# Altium PCB Peripheral_Processor_PCB_V2.PcbDoc (part 1 of 3)
Units mil, origin at the board's own origin, x right, y up, seen from the top; angles counter-clockwise.
Board outline 5600 x 4000 mil, 4 copper layers (Top Layer, Plane(Gnd), Plane(Power), Bottom Layer), stack 23.756 mil thick; 207 components, 234 nets, 739 pads, 214 vias.
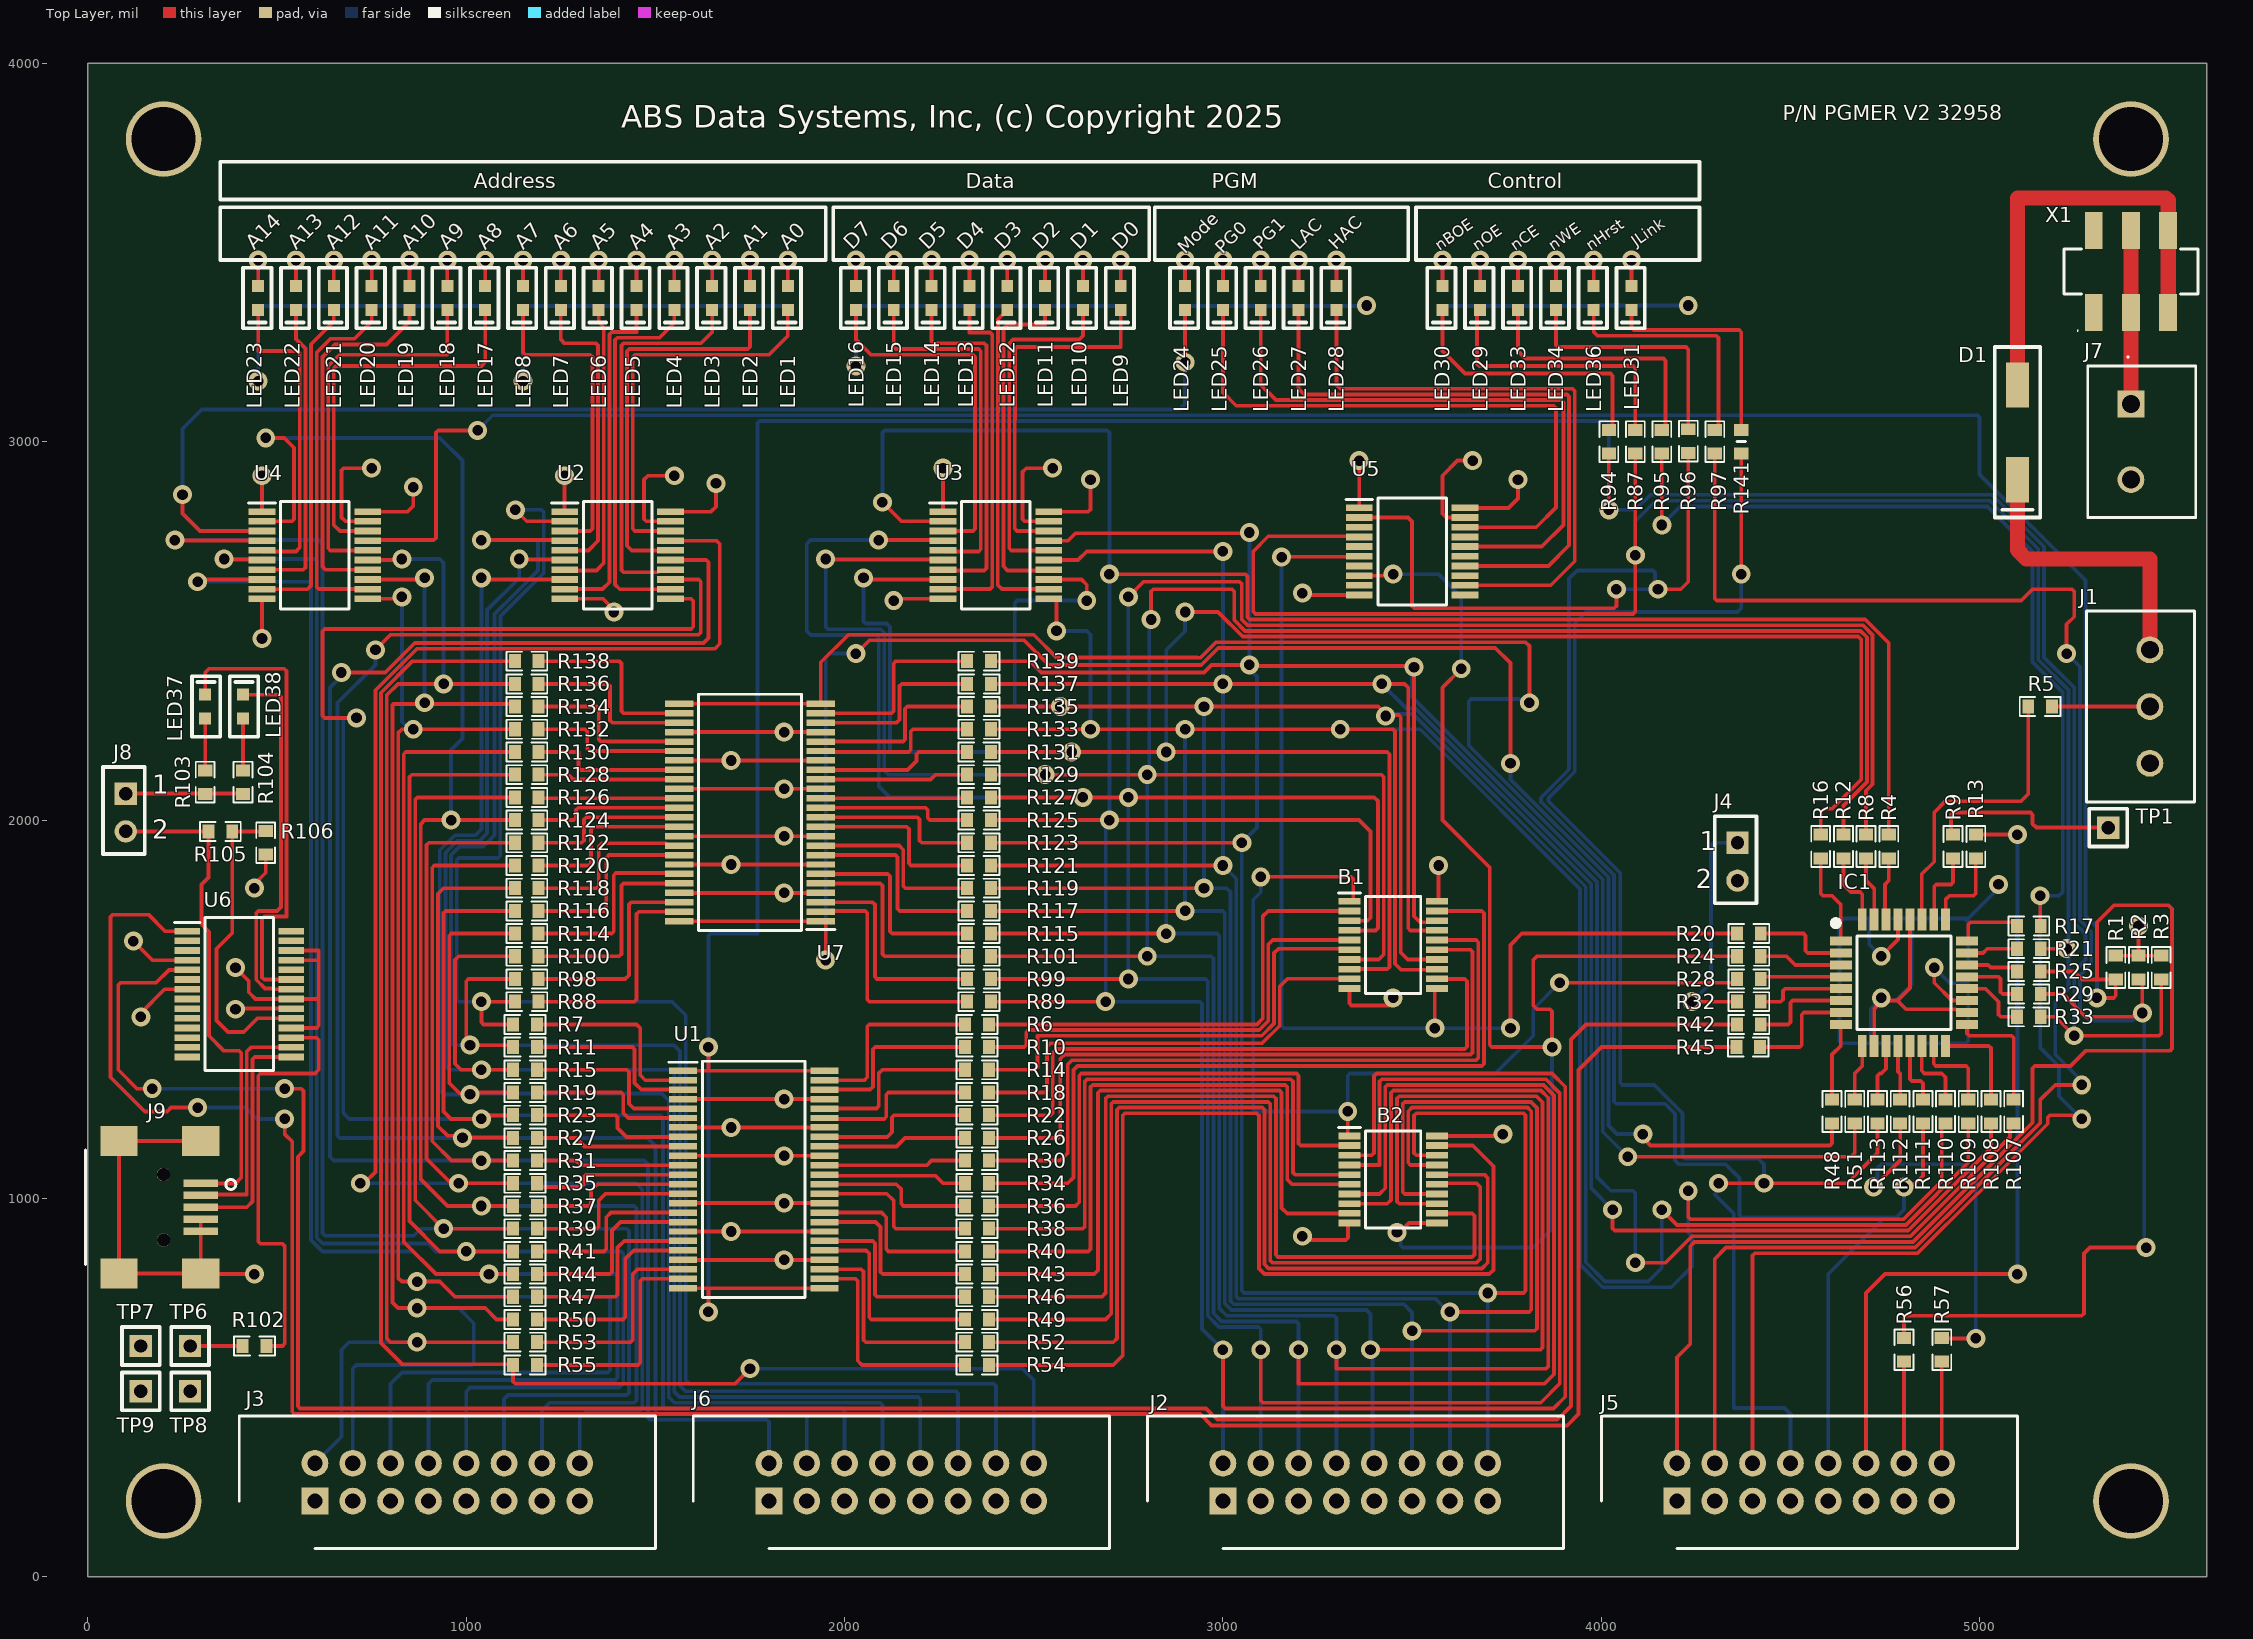
[diagram p0: Top Layer view]
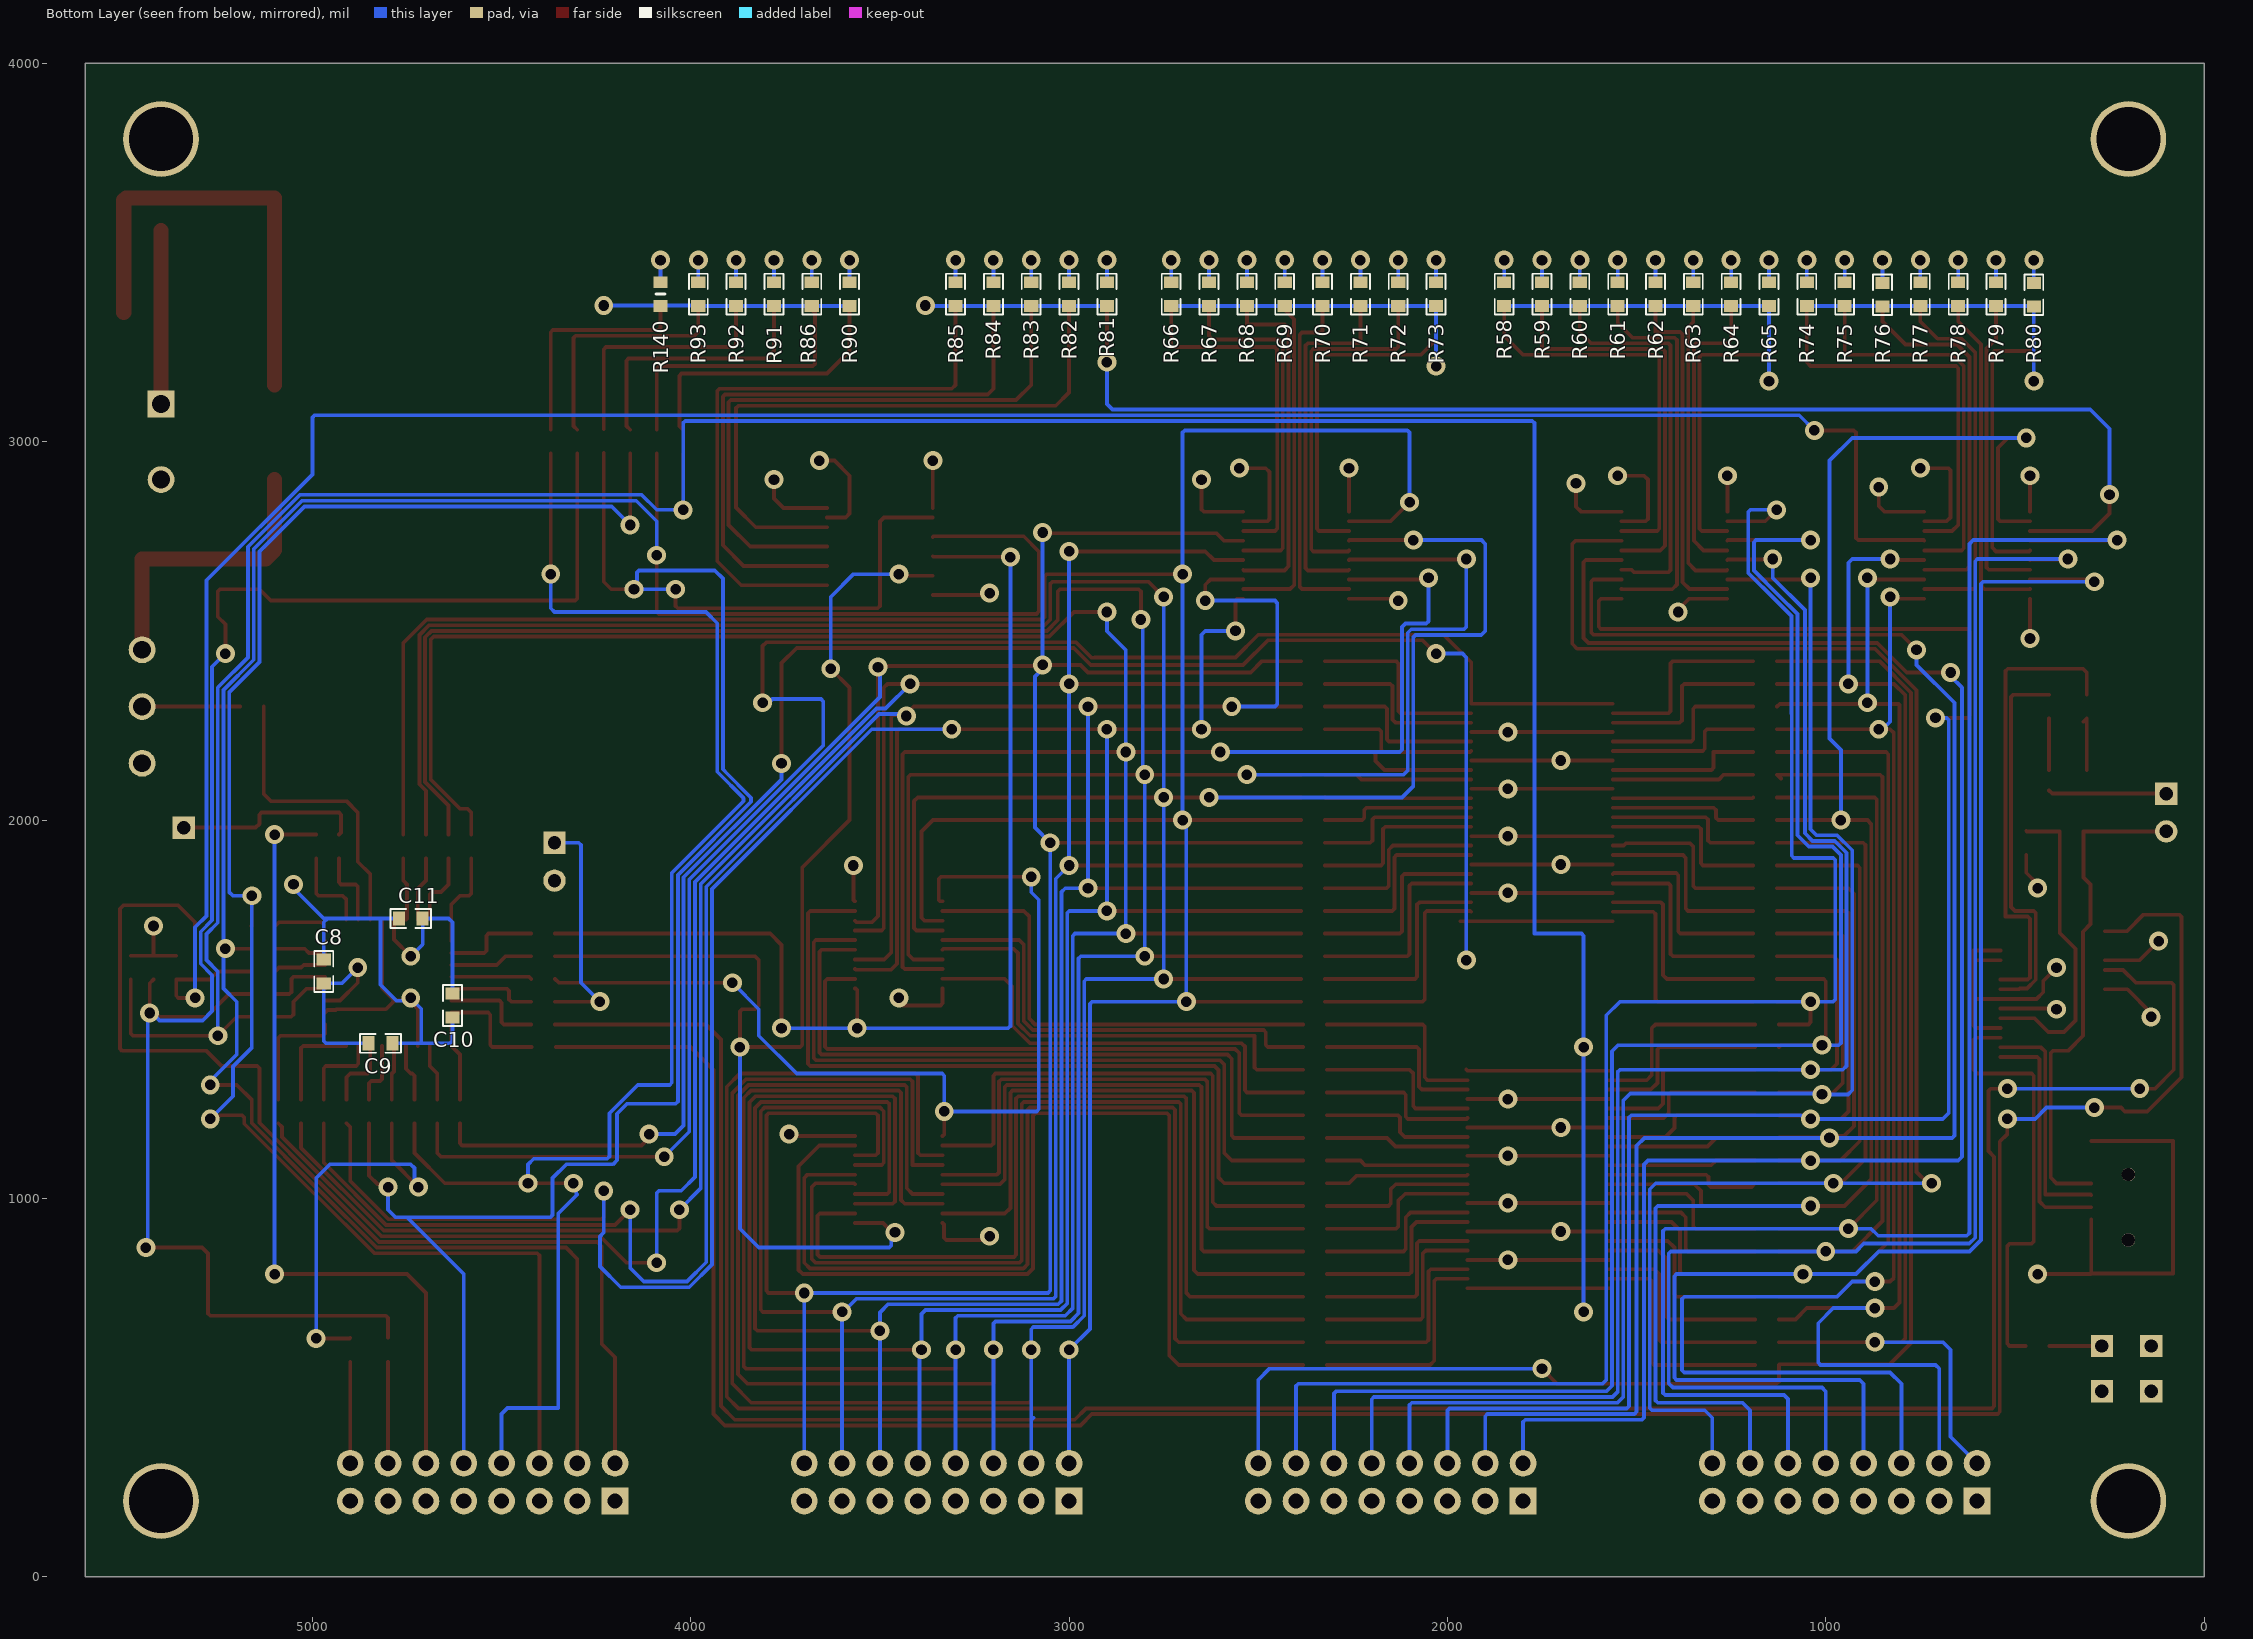
[diagram p1: Bottom Layer view, seen from below]
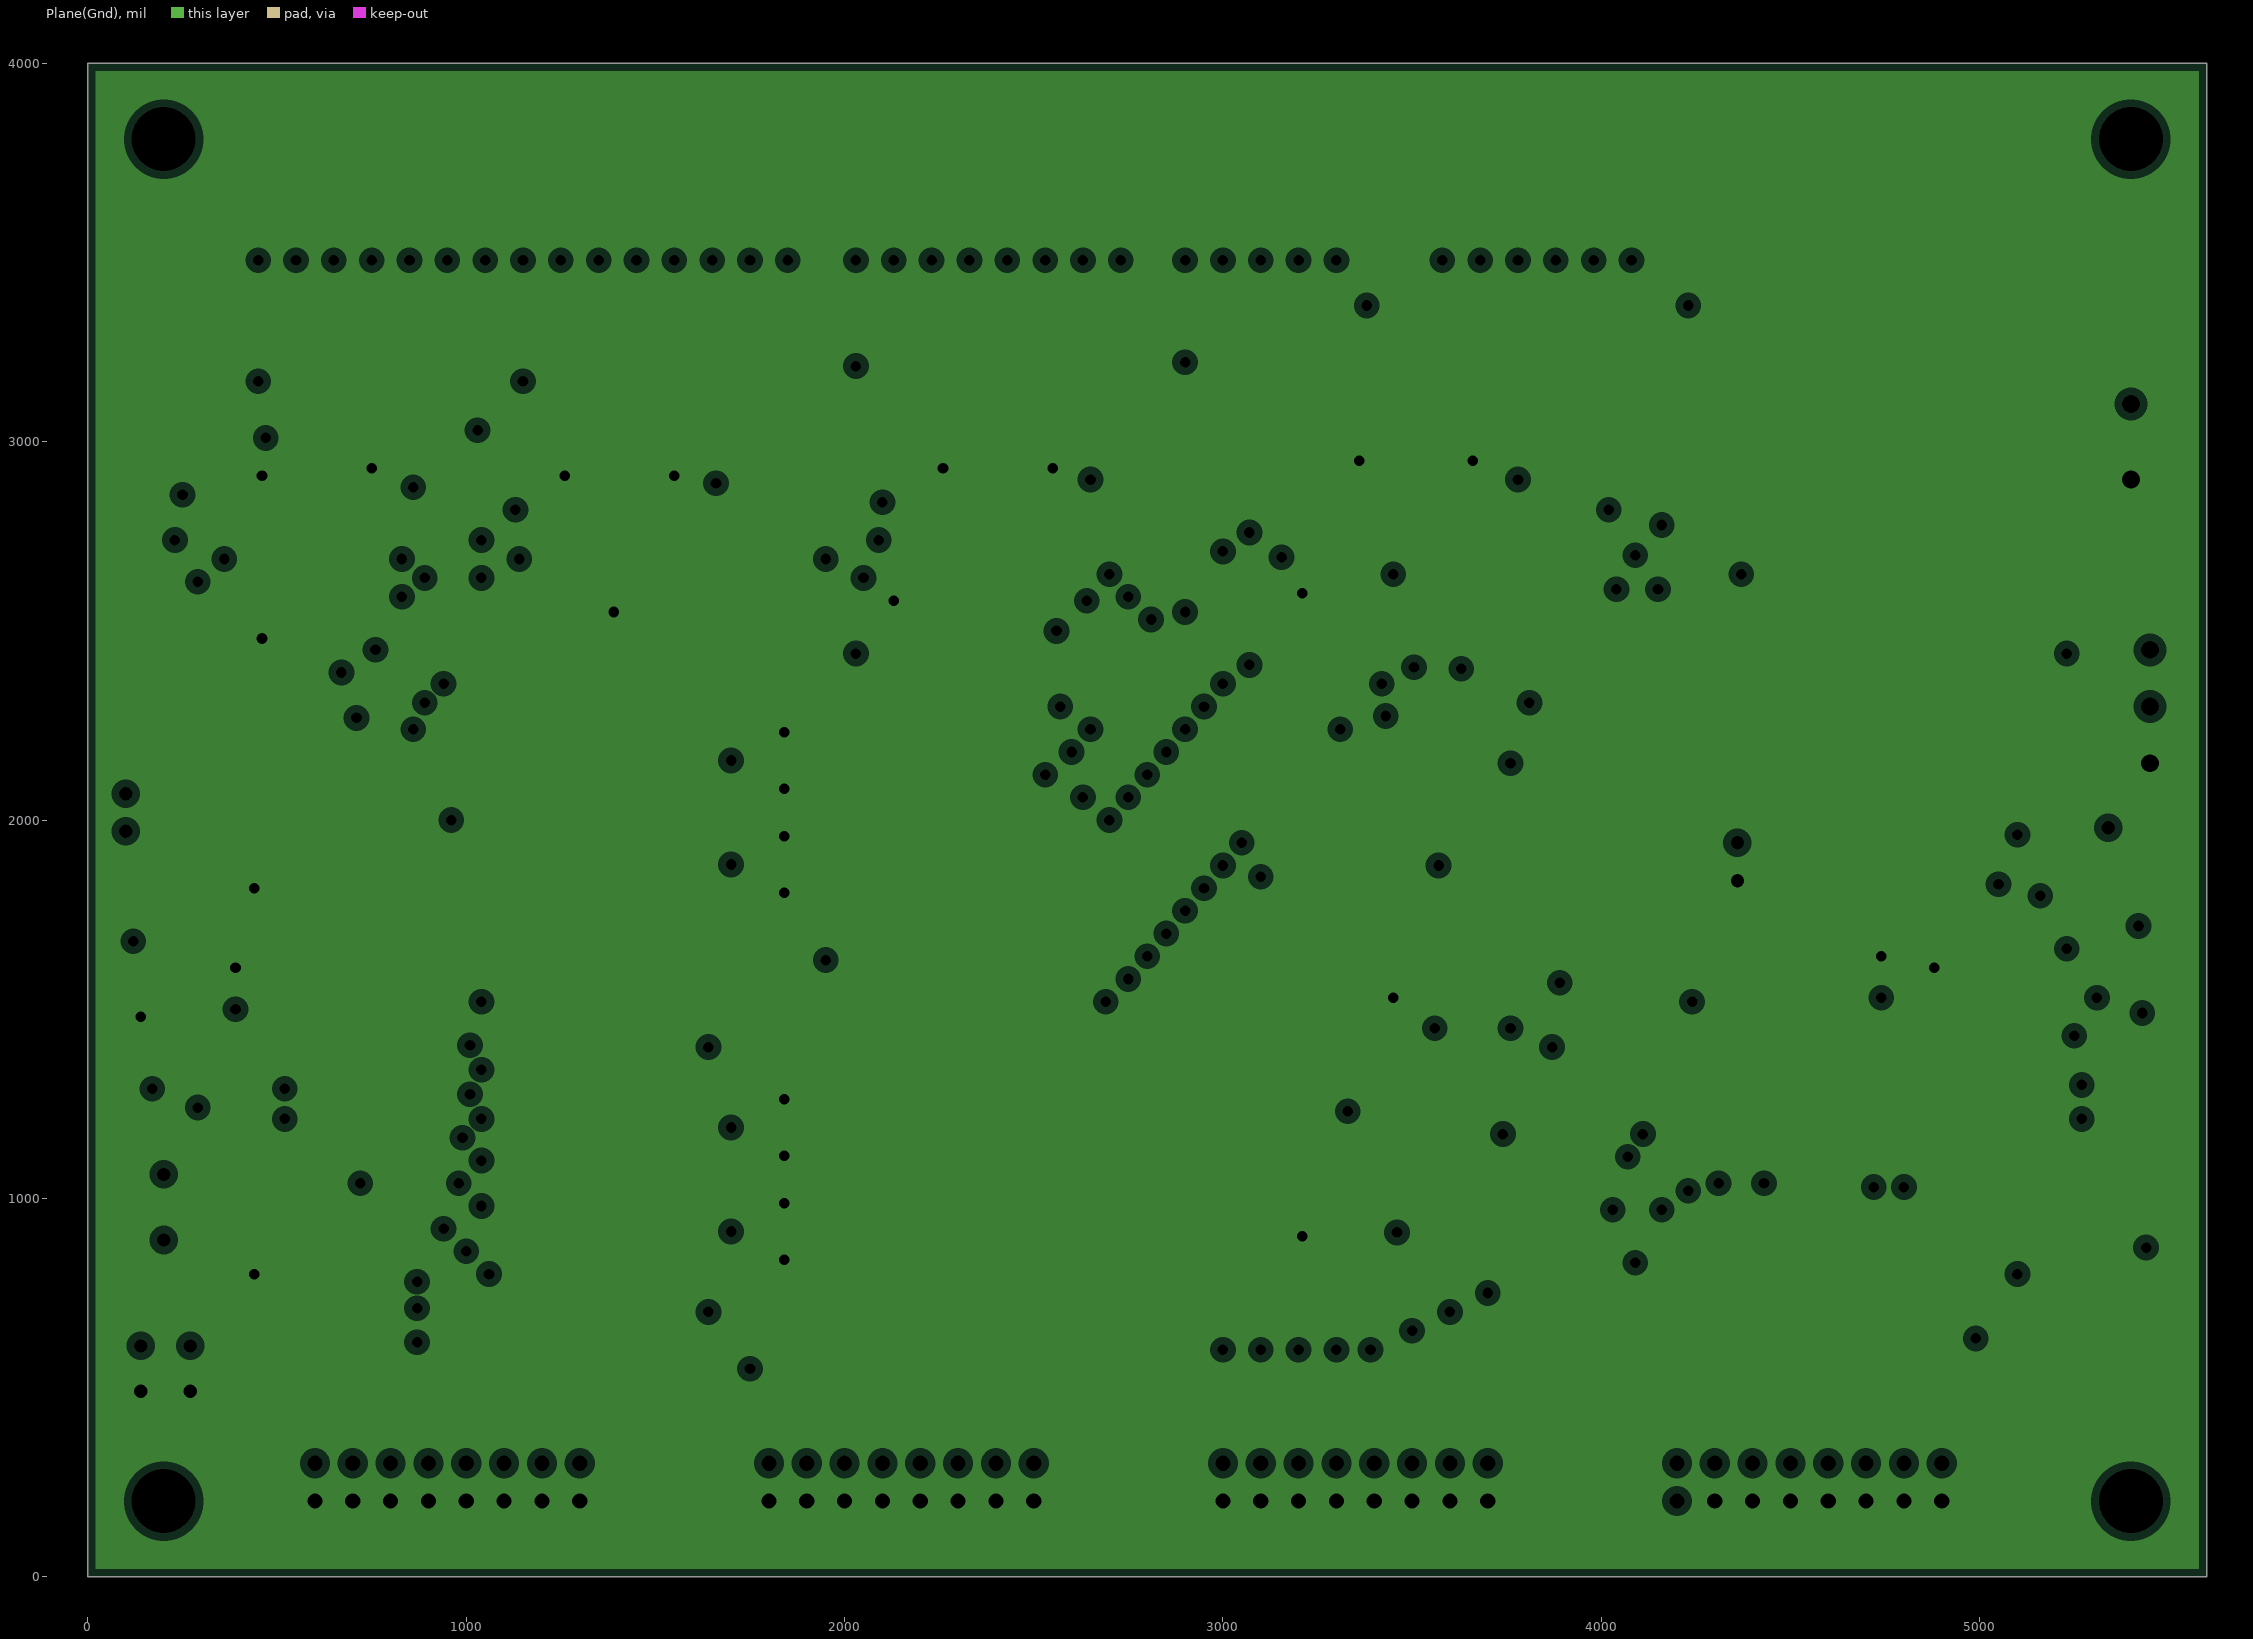
[diagram p2: Plane(Gnd), clearances drawn from the general rule]
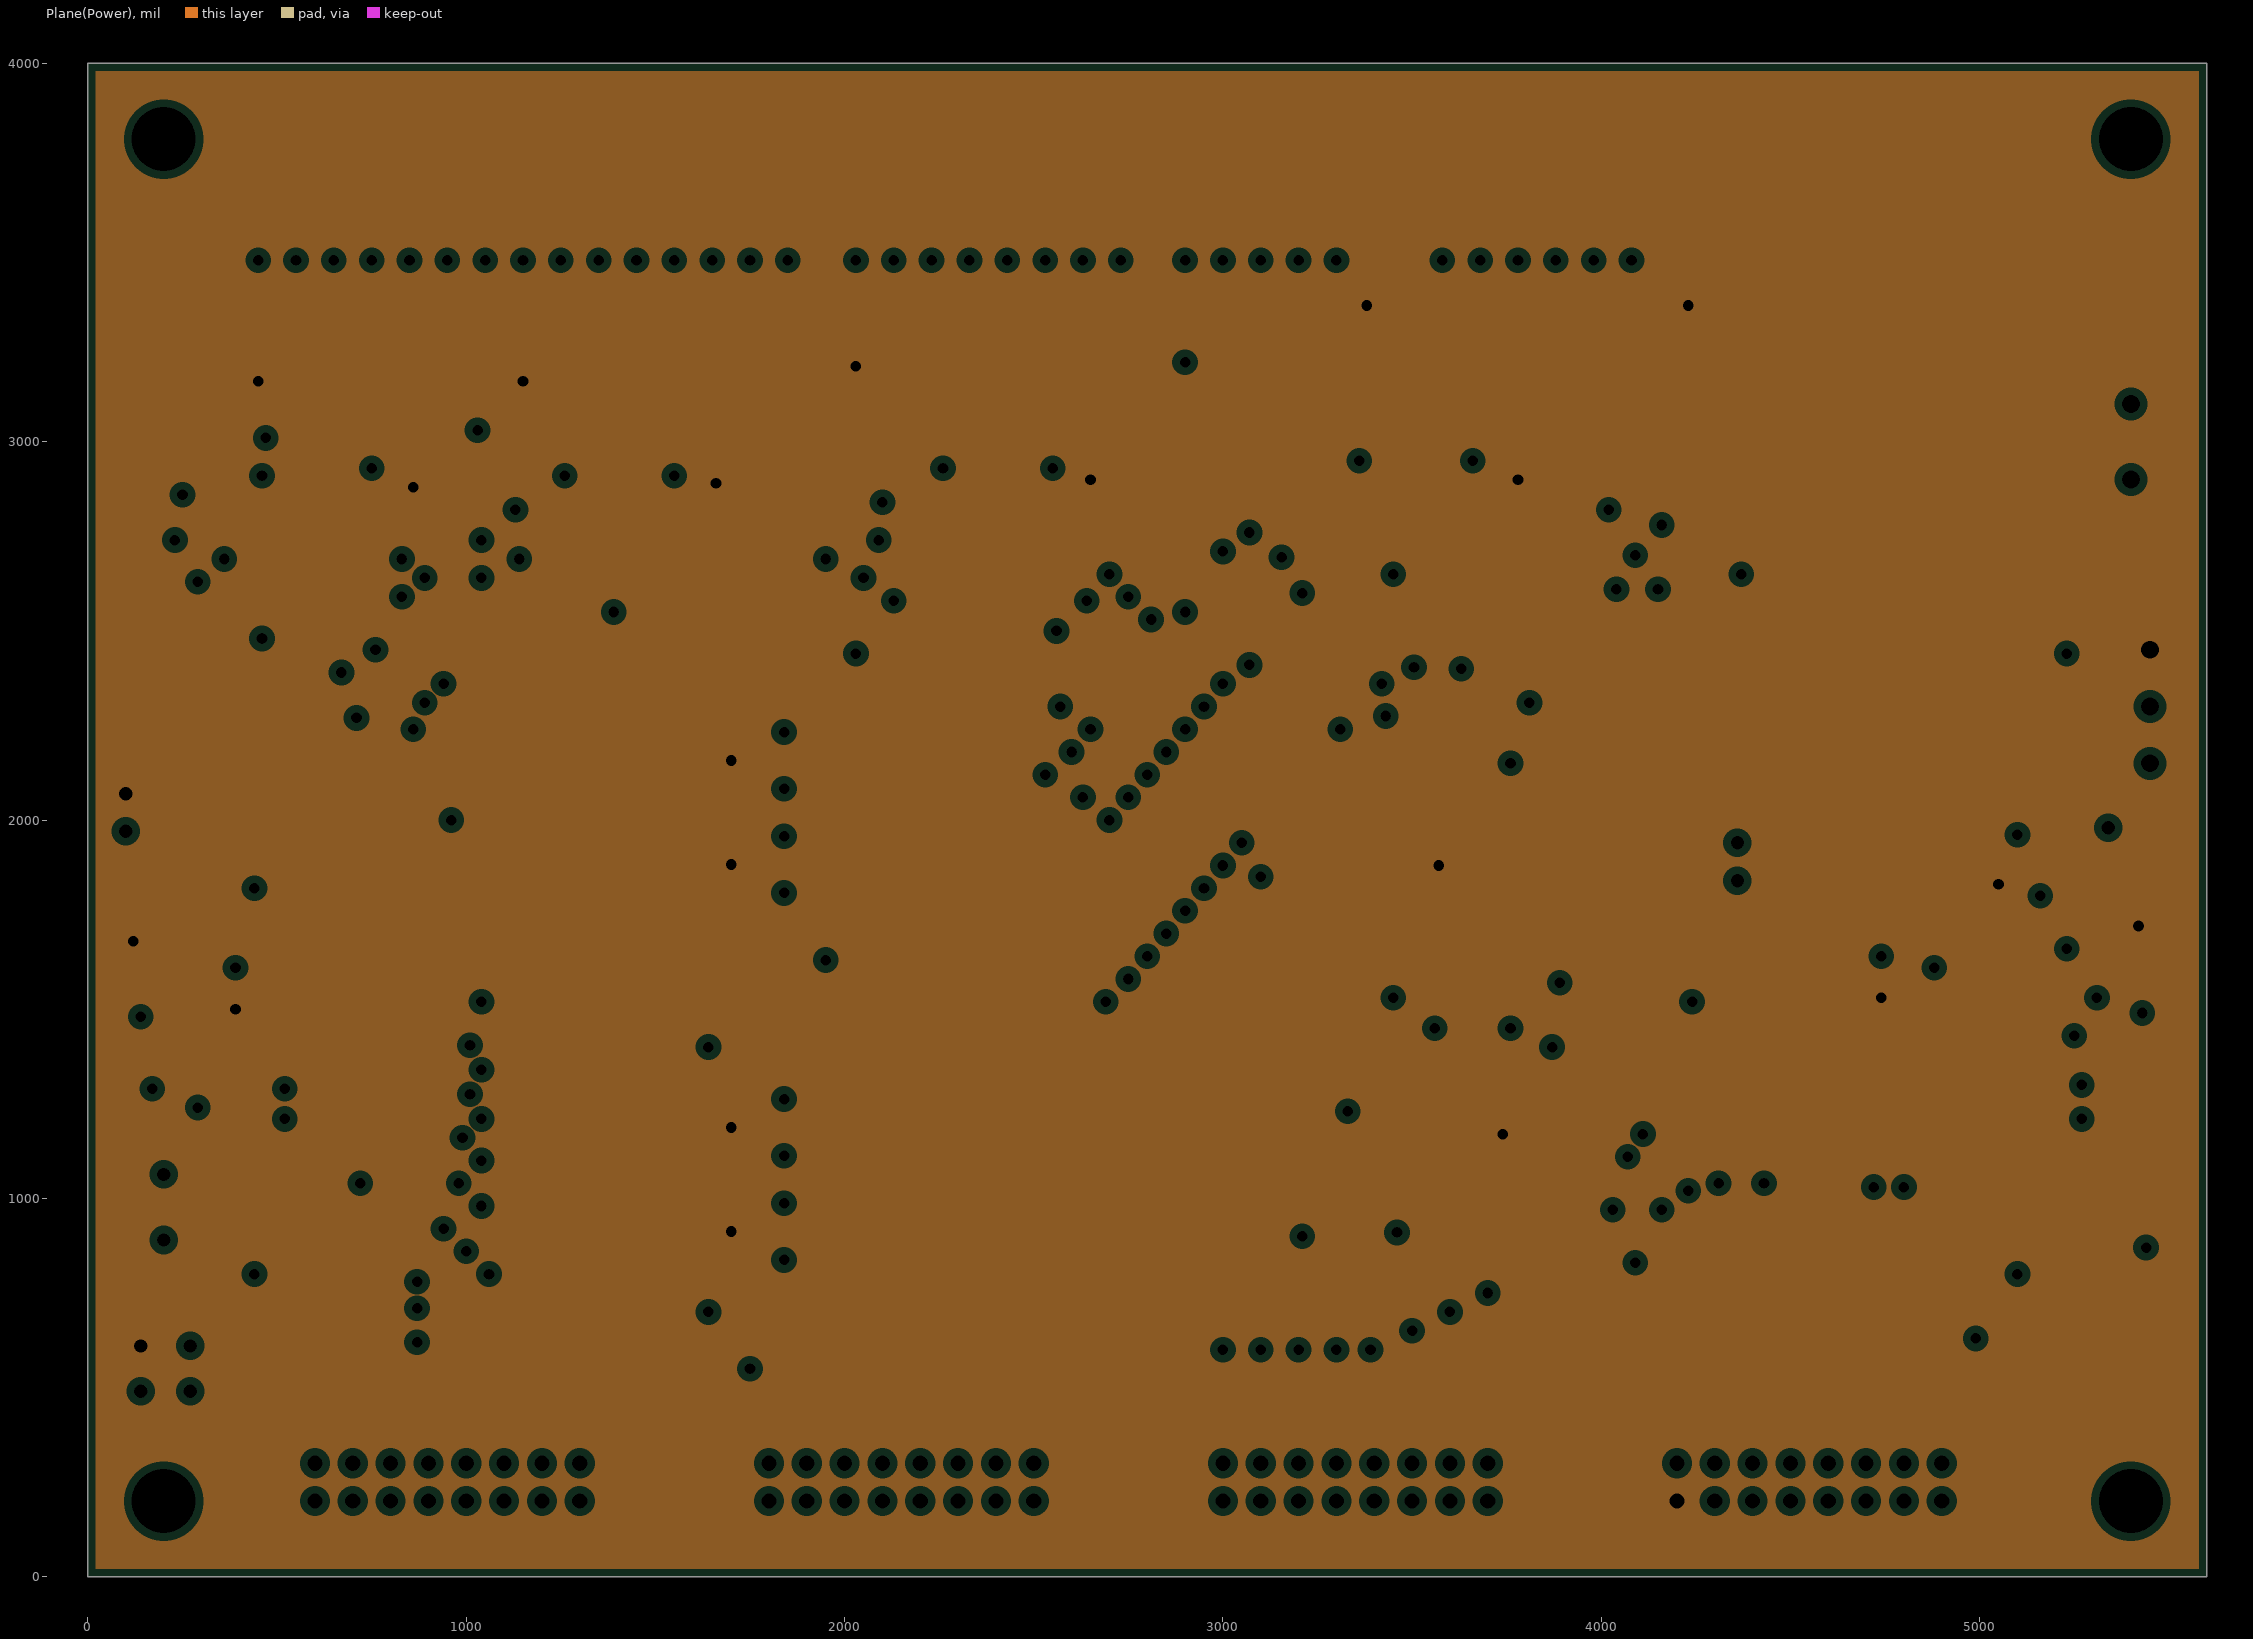
[diagram p3: Plane(Power), clearances drawn from the general rule]
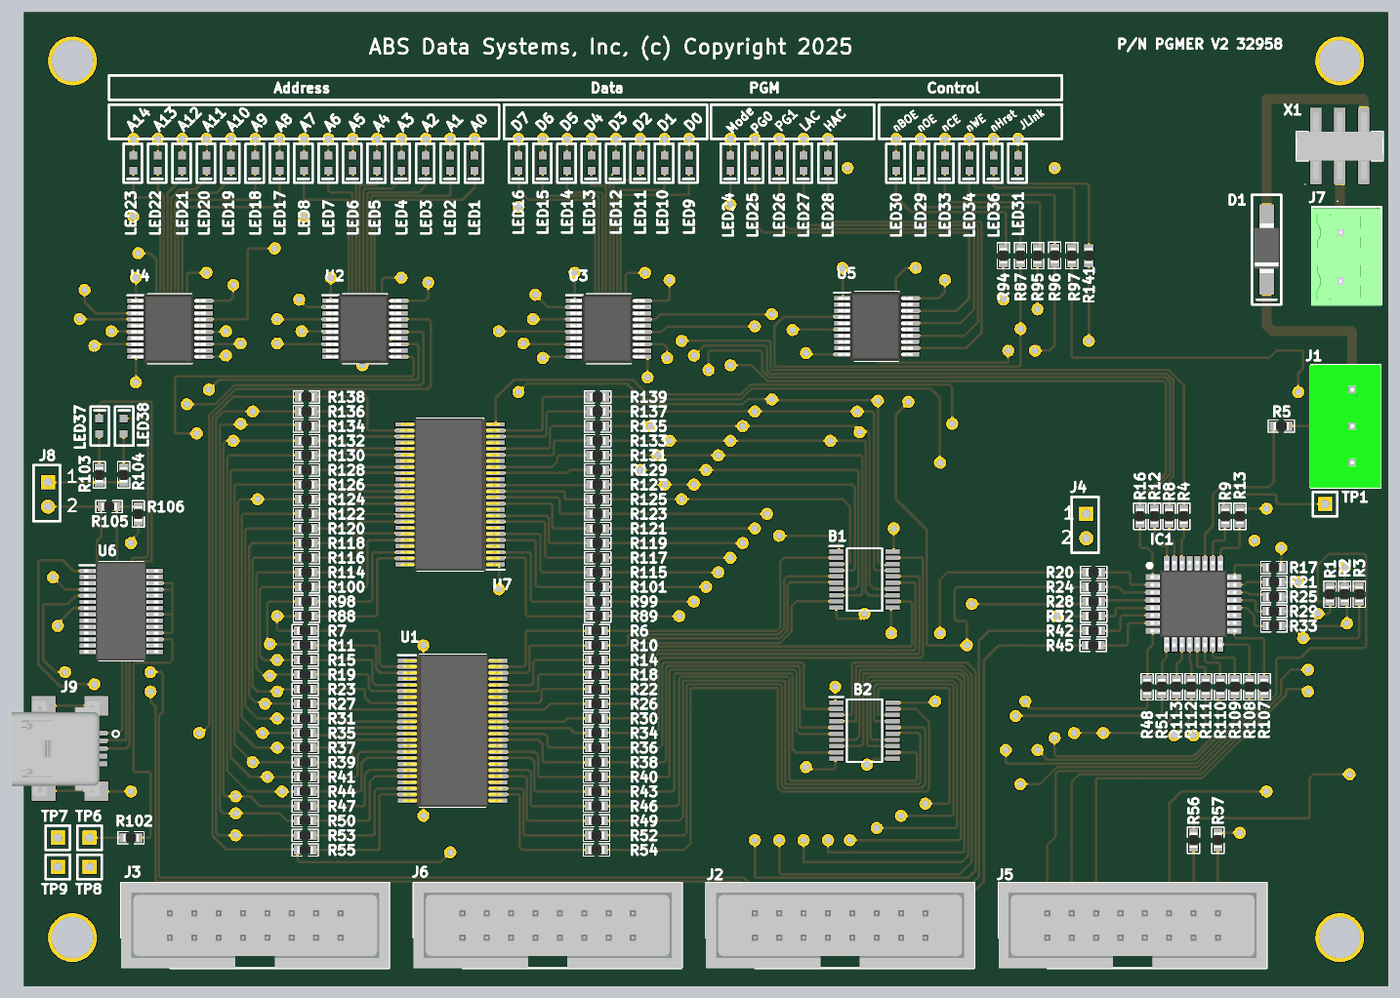
[diagram p5: 3D render of the assembled board from above, using the file's embedded part models]
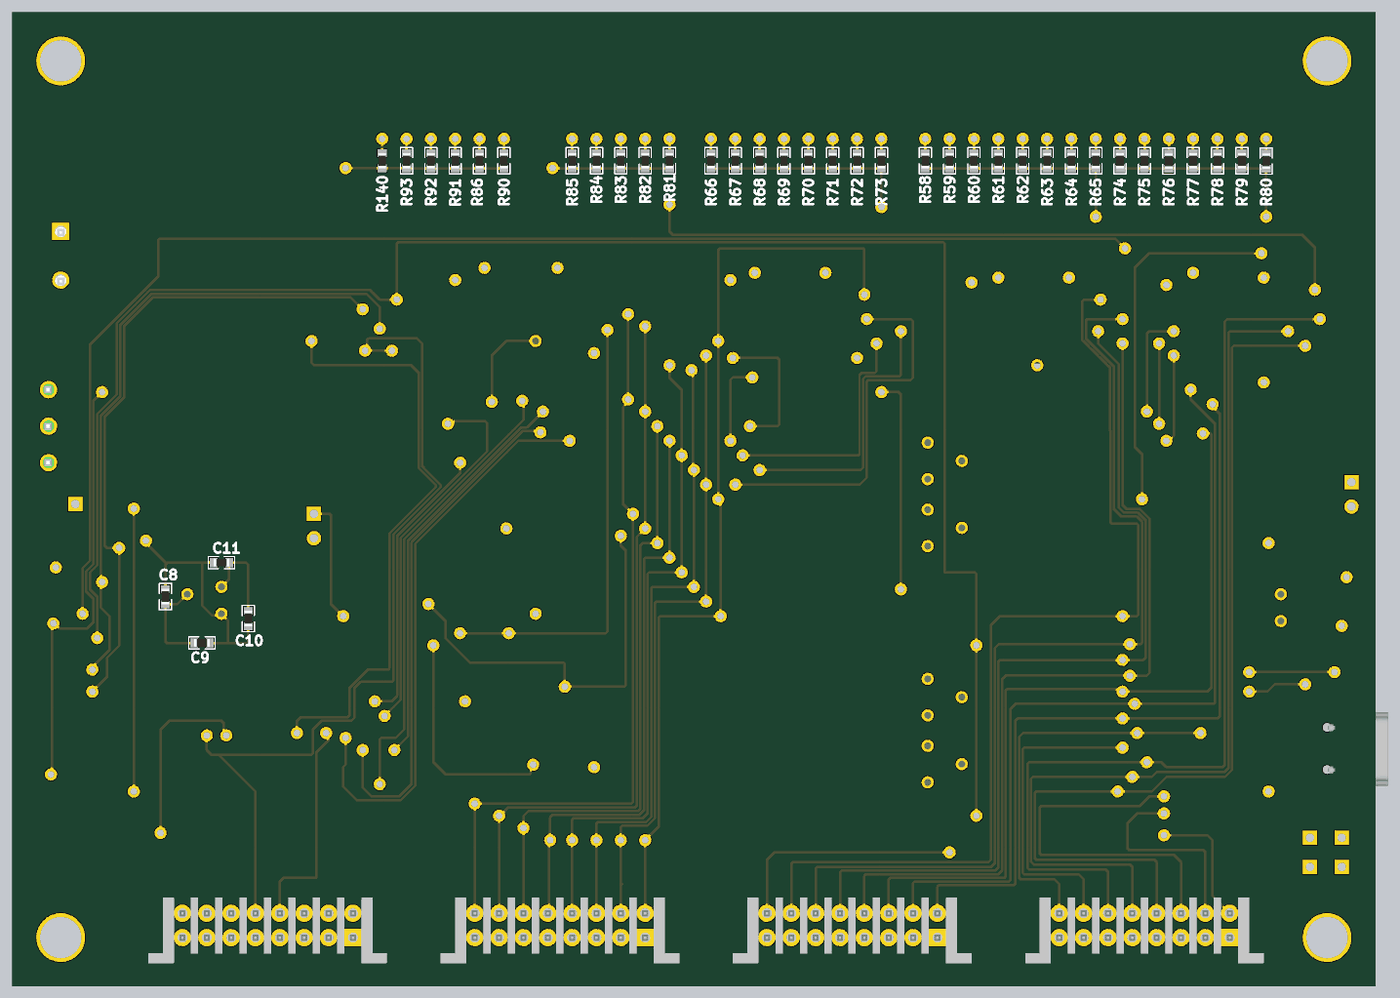
[diagram p6: 3D render of the assembled board from below, using the file's embedded part models]

## Layer stack, top to bottom
Top Solder: solder mask 0.4, Solder Resist, Dk 3.5
Top Layer: signal copper 1.4
Dielectric 2: prepreg 2.8, PP-006, Dk 4.1
Plane(Gnd): plane copper 1.378, net GND
Dielectric 1: dielectric 12.6, FR-4, Dk 4.8
Plane(Power): plane copper 1.378, net +5
Dielectric 3: prepreg 2.8, PP-006, Dk 4.1
Bottom Layer: signal copper 1.4
Bottom Solder: solder mask 0.4, Solder Resist, Dk 3.5

## Board outline
0,0 0,4000 5600,4000 5600,0

## Design rules (kind name [scope] priority, off if disabled: settings)
Clearance [All] p1: gap=5 ignorepadtopadclearanceinfootprint=FALSE
HoleSize [All] p1: absolutevalues=TRUE maxlimit=200 minlimit=1 maxpercent=80.000 minpercent=20.000
HoleToHoleClearance [All] p1: gap=5 allowstackedmicrovias=TRUE
MinimumSolderMaskSliver [All] p1: minsoldermaskwidth=2
PlaneClearance [All] p1: clearance=20
PlaneConnect [All] p1: planeconnectstyle=Relief reliefexpansion=20 reliefentries=4 reliefconductorwidth=10 reliefairgap=10
PolygonConnect [All] p1: connectstyle=Relief reliefconductorwidth=10 reliefentries=4 polygonreliefangle="90 Angle" airgapwidth=10
RoutingVias [All] p1: holewidth=28 width=50 viastyle="Through Hole" minholewidth=28 minwidth=50 maxholewidth=28 maxwidth=50
SilkToSilkClearance [All] p1: silktosilkclearance=4
SilkToSolderMaskClearance [IsPad] p1: minsilkscreentomaskgap=3.5 clearancetoexposedcopper=TRUE
SolderMaskExpansion [All] p1: expansion=4 istentingtop=FALSE
Width [All] p1: maxlimit=40 minlimit=5 preferedwidth=10 minimp=50.000000 maximp=50.000000 favimp=50.000000
23 further rules are at their usual default settings.

## Classes and differential pairs
component class USB_to_Serial: J8 J9 LED37 LED38 R102 R103 R104 R105 R106 TP6 TP7 TP8 TP9 U6
component class PowerSupply: C8 C9 C10 C11 D1 J7 X1
component class LED_Monitor: LED1 LED2 LED3 LED4 LED5 LED6 LED7 LED8 LED9 LED10 LED11 LED12 LED13 LED14 LED15 LED16 LED17 LED18 LED19 LED20 LED21 LED22 LED23 LED24 LED25 LED26 LED27 LED28 LED29 LED30 LED31 LED33 LED34 LED36 R58 R59 R60 R61 R62 R63 R64 R65 R66 R67 R68 R69 R70 R71 R72 R73 R74 R75 R76 R77 R78 R79 R80 R81 R82 R83 R84 R85 R86 R87 R90 R91 R92 R93 R94 R95 R96 R97 R140 R141 U2 U3 U4 U5
component class AVR_Programmer: B1 B2 IC1 J1 J2 J3 J4 J5 J6 R1 R2 R3 R4 R5 R6 R7 R8 R9 R10 R11 R12 R13 R14 R15 R16 R17 R18 R19 R20 R21 R22 R23 R24 R25 R26 R27 R28 R29 R30 R31 R32 R33 R34 R35 R36 R37 R38 R39 R40 R41 R42 R43 R44 R45 R46 R47 R48 R49 R50 R51 R52 R53 R54 R55 R56 R57 R88 R89 R98 R99 R100 R101 R107 R108 R109 R110 R111 R112 R113 R114 R115 R116 R117 R118 R119 R120 R121 R122 R123 R124 R125 R126 R127 R128 R129 R130 R131 R132 R133 R134 R135 R136 R137 R138 R139 TP1 U1 U7

## Components (designator, comment, footprint, x,y, rotation, side; value= is the part's Value field where it differs from the comment)
B1 "SN74HCS273PWR" SOP65P640X120-20N 3450,1670 r0 top locked
B2 "SN74HCS273PWR" SOP65P640X120-20N 3450,1050 r0 top locked
C8 "100nf" 0603 4970,1600 r270 bottom
C9 "1nf" 0603 4820,1410 r0 bottom
C10 "1uf" 0603 4630,1510 r90 bottom
C11 "100nf" 0603 4740,1740 r180 bottom
D1 "S3AFGHM3" DO-221AC 5100,3000 r270 top locked
IC1 "AVR64DD32-I_PT" QFP80P900X900X120-32N 4800,1570 r0 top locked
J1 "1803439" 1803439 5450,2150 r270 top
J2 "70246-1604" SHDR16W99P254_2X8_2794X889X927P 3000,200 r0 top locked
J3 "70246-1604" SHDR16W99P254_2X8_2794X889X927P 600,200 r0 top locked
J4 "Logic Analyzer Clock" Jumper 4360,1940 r180 top
J5 "70246-1604" SHDR16W99P254_2X8_2794X889X927P 4200,200 r0 top locked
J6 "70246-1604" SHDR16W99P254_2X8_2794X889X927P 1800,200 r0 top locked
J7 "1836299" 1836299 5400,3100 r270 top locked
J8 "Power Via USB" Jumper 100,2070 r180 top
J9 "USB Micro Connector" 1734035-2USB 200,890 r0 top locked
LED1 "green" 0603_Diode 1850,3380 r90 top
LED2 "green" 0603_Diode 1750,3380 r90 top
LED3 "green" 0603_Diode 1650,3380 r90 top
LED4 "green" 0603_Diode 1550,3380 r90 top
LED5 "green" 0603_Diode 1450,3380 r90 top
LED6 "green" 0603_Diode 1350,3380 r90 top
LED7 "green" 0603_Diode 1250,3380 r90 top
LED8 "green" 0603_Diode 1150,3380 r90 top
LED9 "blue" 0603_Diode 2730,3380 r90 top
LED10 "blue" 0603_Diode 2630,3380 r90 top
LED11 "blue" 0603_Diode 2530,3380 r90 top
LED12 "blue" 0603_Diode 2430,3380 r90 top
LED13 "blue" 0603_Diode 2330,3380 r90 top
LED14 "green" 0603_Diode 2230,3380 r90 top
LED15 "green" 0603_Diode 2130,3380 r90 top
LED16 "green" 0603_Diode 2030,3380 r90 top
LED17 "green" 0603_Diode 1050,3380 r90 top
LED18 "green" 0603_Diode 950,3380 r90 top
LED19 "green" 0603_Diode 850,3380 r90 top
LED20 "green" 0603_Diode 750,3380 r90 top
LED21 "green" 0603_Diode 650,3380 r90 top
LED22 "green" 0603_Diode 550,3380 r90 top
LED23 "green" 0603_Diode 450,3380 r90 top
LED24 "red" 0603_Diode 2900,3380 r90 top
LED25 "red" 0603_Diode 3000,3380 r90 top
LED26 "red" 0603_Diode 3100,3380 r90 top
LED27 "amber" 0603_Diode 3200,3380 r90 top
LED28 "amber" 0603_Diode 3300,3380 r90 top
LED29 "amber" 0603_Diode 3680,3380 r90 top
LED30 "amber" 0603_Diode 3580,3380 r90 top
LED31 "amber" 0603_Diode 4080,3380 r90 top
LED33 "amber" 0603_Diode 3780,3380 r90 top
LED34 "amber" 0603_Diode 3880,3380 r90 top
LED36 "amber" 0603_Diode 3980,3380 r90 top
LED37 "green" 0603_Diode 310,2300 r270 top
LED38 "red" 0603_Diode 410,2300 r270 top
R1 "10k" 0603 5360,1610 r90 top locked
R2 "10k" 0603 5420,1610 r90 top locked
R3 "10k" 0603 5480,1610 r90 top locked
R4 "0R" 0603 4760,1930 r270 top locked
R5 "0R" 0603 5160,2300 r0 top
R6 "0R" 0603 2350,1460 r180 top
R7 "0R" 0603 1155,1460 r180 top
R8 "0R" 0603 4700,1930 r270 top locked
R9 "0R" 0603 4930,1930 r90 top locked
R10 "0R" 0603 2350,1400 r180 top
R11 "0R" 0603 1155,1400 r180 top
R12 "0R" 0603 4640,1930 r270 top locked
R13 "0R" 0603 4990,1930 r90 top locked
R14 "0R" 0603 2350,1340 r180 top
R15 "0R" 0603 1155,1340 r180 top
R16 "0R" 0603 4580,1930 r270 top locked
R17 "0R" 0603 5130,1720 r0 top locked
R18 "0R" 0603 2350,1280 r180 top
R19 "0R" 0603 1155,1280 r180 top
R20 "0R" 0603 4390,1700 r0 top locked
R21 "0R" 0603 5130,1660 r0 top locked
R22 "0R" 0603 2350,1220 r180 top
R23 "0R" 0603 1155,1220 r180 top
R24 "0R" 0603 4390,1640 r0 top locked
R25 "0R" 0603 5130,1600 r0 top locked
R26 "0R" 0603 2350,1160 r180 top
R27 "0R" 0603 1155,1160 r180 top
R28 "0R" 0603 4390,1580 r0 top locked
R29 "0R" 0603 5130,1540 r0 top locked
R30 "0R" 0603 2350,1100 r180 top
R31 "0R" 0603 1155,1100 r180 top
R32 "0R" 0603 4390,1520 r0 top locked
R33 "0R" 0603 5130,1480 r0 top locked
R34 "0R" 0603 2350,1040 r180 top
R35 "0R" 0603 1155,1040 r180 top
R36 "0R" 0603 2350,980 r180 top
R37 "0R" 0603 1155,980 r180 top
R38 "0R" 0603 2350,920 r180 top
R39 "0R" 0603 1155,920 r180 top
R40 "0R" 0603 2350,860 r180 top
R41 "0R" 0603 1155,860 r180 top
R42 "0R" 0603 4390,1460 r0 top locked
R43 "0R" 0603 2350,800 r180 top
R44 "0R" 0603 1155,800 r180 top
R45 "0R" 0603 4388.5,1400 r0 top locked
R46 "0R" 0603 2350,740 r180 top
R47 "0R" 0603 1155,740 r180 top
R48 "0R" 0603 4610,1230 r90 top locked
R49 "0R" 0603 2350,680 r180 top
R50 "0R" 0603 1155,680 r180 top
R51 "0R" 0603 4670,1230 r90 top locked
R52 "0R" 0603 2350,620 r180 top
R53 "0R" 0603 1155,620 r180 top
R54 "0R" 0603 2350,560 r180 top
R55 "0R" 0603 1155,560 r180 top
R56 "0R" 0603 4800,600 r270 top
R57 "0R" 0603 4900,600 r270 top
R58 "4.7k" 0603 1850,3390 r270 bottom
R59 "4.7k" 0603 1750,3390 r270 bottom
R60 "4.7k" 0603 1650,3390 r270 bottom
R61 "4.7k" 0603 1550,3390 r270 bottom
R62 "4.7k" 0603 1450,3390 r270 bottom
R63 "4.7k" 0603 1350,3390 r270 bottom
R64 "4.7k" 0603 1250,3390 r270 bottom
R65 "4.7k" 0603 1150,3390 r270 bottom
R66 "4.7k" 0603 2730,3390 r270 bottom
R67 "4.7k" 0603 2630,3390 r270 bottom
R68 "4.7k" 0603 2530,3390 r270 bottom
R69 "4.7k" 0603 2430,3390 r270 bottom
R70 "4.7k" 0603 2330,3390 r270 bottom
R71 "4.7k" 0603 2230,3390 r270 bottom
R72 "4.7k" 0603 2130,3390 r270 bottom
R73 "4.7k" 0603 2030,3390 r270 bottom
R74 "4.7k" 0603 1050,3390 r270 bottom
R75 "4.7k" 0603 950,3390 r270 bottom
R76 "4.7k" 0603 850,3388.5 r270 bottom
R77 "4.7k" 0603 750,3390 r270 bottom
R78 "4.7k" 0603 650,3390 r270 bottom
R79 "4.7k" 0603 550,3390 r270 bottom
R80 "4.7k" 0603 450,3388.5 r270 bottom
R81 "1k" 0603 2900,3390 r270 bottom
R82 "1k" 0603 3000,3390 r270 bottom
R83 "1k" 0603 3100,3390 r270 bottom
R84 "1k" 0603 3200,3390 r270 bottom
R85 "1k" 0603 3300,3390 r270 bottom
R86 "1k" 0603 3680,3390 r270 bottom
R87 "0R" 0603 4090,3000 r90 top
R88 "0R" 0603 1160,1520 r0 top
R89 "0R" 0603 2355,1520 r0 top
R90 "1k" 0603 3580,3390 r270 bottom
R91 "1k" 0603 3780,3390 r270 bottom
R92 "1k" 0603 3880,3390 r270 bottom
R93 "1k" 0603 3980,3390 r270 bottom
R94 "0R" 0603 4020,3000 r90 top
R95 "0R" 0603 4160,3000 r90 top
R96 "0R" 0603 4230,3001.5 r90 top
R97 "0R" 0603 4300,3000 r90 top
R98 "0R" 0603 1160,1580 r0 top
R99 "0R" 0603 2355,1580 r0 top
R100 "0R" 0603 1160,1640 r0 top
R101 "0R" 0603 2355,1640 r0 top
R102 "0R" 0603 440,610 r180 top
R103 "4.7k" 0603 310,2100 r270 top
R104 "1k" 0603 410,2100 r270 top
R105 "4.7k" 0603 350,1970 r180 top
R106 "10k" 0603 470,1940 r90 top
R107 "0R" 0603 5090,1230 r270 top locked
R108 "0R" 0603 5030,1230 r270 top locked
R109 "0R" 0603 4970,1230 r270 top locked
R110 "0R" 0603 4910,1230 r270 top locked
R111 "0R" 0603 4850,1230 r270 top locked
R112 "0R" 0603 4790,1230 r270 top locked
R113 "0R" 0603 4730,1230 r270 top locked
R114 "0R" 0603 1160,1700 r0 top
R115 "0R" 0603 2355,1700 r0 top
R116 "0R" 0603 1160,1760 r0 top
R117 "0R" 0603 2355,1760 r0 top
R118 "0R" 0603 1160,1820 r0 top
R119 "0R" 0603 2355,1820 r0 top
R120 "0R" 0603 1160,1880 r0 top
R121 "0R" 0603 2355,1880 r0 top
R122 "0R" 0603 1160,1940 r0 top
R123 "0R" 0603 2355,1940 r0 top
R124 "0R" 0603 1160,2000 r0 top
R125 "0R" 0603 2355,2000 r0 top
R126 "0R" 0603 1160,2060 r0 top
R127 "0R" 0603 2355,2060 r0 top
R128 "0R" 0603 1160,2120 r0 top
R129 "0R" 0603 2355,2120 r0 top
R130 "0R" 0603 1160,2180 r0 top
R131 "0R" 0603 2355,2180 r0 top
R132 "0R" 0603 1160,2240 r0 top
R133 "0R" 0603 2355,2240 r0 top
R134 "0R" 0603 1160,2300 r0 top
R135 "0R" 0603 2355,2300 r0 top
R136 "0R" 0603 1160,2360 r0 top
R137 "0R" 0603 2355,2360 r0 top
R138 "0R" 0603 1160,2420 r0 top
R139 "0R" 0603 2355,2420 r0 top
R140 "1k" 0603 4080,3390 r270 bottom
R141 "0R" 0603 4370,3000 r90 top
TP1 "TP" TP 5340,1980 r0 top
TP6 "TP" TP 270,610 r0 top
TP7 "TP" TP 140,610 r0 top
TP8 "TP" TP 270,490 r0 top
TP9 "TP" TP 140,490 r0 top
U1 "CY74FCT16244TPVC" SSOP-48 1760,1050 r0 top locked
U2 "SN74ABT240ADBR" SOP65P780X200-20N 1400,2700 r0 top locked
U3 "SN74ABT240ADBR" SOP65P780X200-20N 2400,2700 r0 top locked
U4 "SN74ABT240ADBR" SOP65P780X200-20N 600,2700 r0 top locked
U5 "SN74ABT240ADBR" SOP65P780X200-20N 3500,2710 r0 top locked
U6 "FT232RL-REEL" SOIC-28_Narrow 400,1540 r0 top locked
U7 "CY74FCT16244TPVC" SSOP-48 1750,2020 r180 top locked
X1 "JS202011SCQN" JS202011SCQN 5400,3450 r0 top locked

## Footprints (in the part's own frame and the unit in brackets; to place one, negate y for a bottom-side part, rotate by r counter-clockwise, add the part's x,y. Pads: shape width x height; smd on the part's side, far side on the other; paste and mask are expansions set on the pad)
0603 [mm]
  rect 0.8x0.95 smd: 1(-0.8,0) 2(0.8,0)
  silkscreen extent -1.37,-0.64 1.37,0.64, body extent -0.8,-0.4 0.8,0.4, height 0.55
0603_Diode [mm]
  rect 0.8x0.8 smd: 1(-0.8,0) 2(0.8,0)
  silkscreen extent -2.03,-0.89 2.03,1.02
1734035-2USB [mm]
  rect 2.3x0.5 smd: 1(2.5,3.8) 2(2.5,3) 3(2.5,2.2) 4(2.5,1.4) 5(2.5,0.6)
  rect 2.5x2 smd: 6(2.5,-2.25) 7(-3,-2.25) 8(-3,6.65) 9(2.5,6.65)
  round 0.9 hole 0.9 unplated: 10(0,4.4) 11(0,0)
  silkscreen extent -5.25,-1.65 4.85,6.05, body extent -6.35,-2.79 2.85,7.11, height 4.17
1803439 [mm]
  round 1.8 hole 1.2: 1(-7.62,0) 2(-3.81,0) 3(0,0)
  silkscreen extent -10.22,-4.25 2.6,3, body extent -10.22,-4.45 2.6,3.05, height 9.33
1836299 [mm]
  rect 1.8x1.8 hole 1.2: 1(0,0)
  round 1.8 hole 1.2: 2(5.08,0)
  silkscreen extent -3.2,-2.9 7.62,4.35, body extent -2.41,-2.92 7.75,4.33, height 9.2
DO-221AC [mil]
  rect 120x60 smd: 1(100,0) 2(-150,0)
  silkscreen extent -250,-60 200,60, body extent -132,-51 72,51, height 43
JS202011SCQN [mm]
  rect 1.2x2.5 smd: 1(-2.5,-2.75) 2(0,-2.75) 3(2.5,-2.75) 4(2.5,2.75) 5(0,2.75) 6(-2.5,2.75)
  silkscreen extent -4.5,-4 4.5,1.5, body extent -4.5,-3.5 4.5,3.5, height 5.65
Jumper [mm] "Connector; Header; 8x2 Position"
  rect 1.5x1.5 hole 0.9: 1(0,0)
  round 1.5 hole 0.9: 2(0,2.54)
  silkscreen extent -1.27,-1.78 1.52,4.06
QFP80P900X900X120-32N [mm]
  rect 1.475x0.6 smd: 1(-4.238,2.8) 2(-4.238,2) 3(-4.238,1.2) 4(-4.238,0.4) 5(-4.238,-0.4) 6(-4.238,-1.2) 7(-4.238,-2) 8(-4.238,-2.8) 17(4.238,-2.8) 18(4.238,-2) 19(4.238,-1.2) 20(4.238,-0.4) 21(4.238,0.4) 22(4.238,1.2) 23(4.238,2) 24(4.238,2.8)
  rect 0.6x1.475 smd: 9(-2.8,-4.238) 10(-2,-4.238) 11(-1.2,-4.238) 12(-0.4,-4.238) 13(0.4,-4.238) 14(1.2,-4.238) 15(2,-4.238) 16(2.8,-4.238) 25(2.8,4.238) 26(2,4.238) 27(1.2,4.238) 28(0.4,4.238) 29(-0.4,4.238) 30(-1.2,4.238) 31(-2,4.238) 32(-2.8,4.238)
  silkscreen extent -4.77,-3.15 3.15,4.2, body extent -4.5,-4.5 4.5,4.5, height 1.2
SHDR16W99P254_2X8_2794X889X927P [mm]
  rect 1.8x1.8 / inner round 1.8 / far side rect 1.8x1.8 hole 1.016: 1(0,0)
  round 1.8 hole 1.016: 2(0,2.54) 3(2.54,0) 4(2.54,2.54) 5(5.08,0) 6(5.08,2.54) 7(7.62,0) 8(7.62,2.54) 9(10.16,0) 10(10.16,2.54) 11(12.7,0) 12(12.7,2.54) 13(15.24,0) 14(15.24,2.54) 15(17.78,0) 16(17.78,2.54)
  silkscreen extent -5.08,-3.17 22.86,5.71, body extent -5.08,-3.17 22.86,5.71, height 8.38
SOIC-28_Narrow [mm]
  rect 1.7x0.45 smd: 1(-3.5,4.225) 2(-3.5,3.575) 3(-3.5,2.925) 4(-3.5,2.275) 5(-3.5,1.625) 6(-3.5,0.975) 7(-3.5,0.325) 8(-3.5,-0.325) 9(-3.5,-0.975) 10(-3.5,-1.625) 11(-3.5,-2.275) 12(-3.5,-2.925) 13(-3.5,-3.575) 14(-3.5,-4.225) 15(3.5,-4.225) 16(3.5,-3.575) 17(3.5,-2.925) 18(3.5,-2.275) 19(3.5,-1.625) 20(3.5,-0.975) 21(3.5,-0.325) 22(3.5,0.325) 23(3.5,0.975) 24(3.5,1.625) 25(3.5,2.275) 26(3.5,2.925) 27(3.5,3.575) 28(3.5,4.225)
  silkscreen extent -4.35,-5.14 2.3,5.14, body extent -3.89,-5.14 3.89,5.14, height 2
SOP65P640X120-20N [mm]
  rect 1.475x0.45 smd: 1(-2.938,2.925) 2(-2.938,2.275) 3(-2.938,1.625) 4(-2.938,0.975) 5(-2.938,0.325) 6(-2.938,-0.325) 7(-2.938,-0.975) 8(-2.938,-1.625) 9(-2.938,-2.275) 10(-2.938,-2.925) 11(2.938,-2.925) 12(2.938,-2.275) 13(2.938,-1.625) 14(2.938,-0.975) 15(2.938,-0.325) 16(2.938,0.325) 17(2.938,0.975) 18(2.938,1.625) 19(2.938,2.275) 20(2.938,2.925)
  silkscreen extent -3.67,-3.25 1.85,3.5
SOP65P780X200-20N [mm]
  rect 1.8x0.45 smd: 1(-3.55,2.925) 2(-3.55,2.275) 3(-3.55,1.625) 4(-3.55,0.975) 5(-3.55,0.325) 6(-3.55,-0.325) 7(-3.55,-0.975) 8(-3.55,-1.625) 9(-3.55,-2.275) 10(-3.55,-2.925) 11(3.55,-2.925) 12(3.55,-2.275) 13(3.55,-1.625) 14(3.55,-0.975) 15(3.55,-0.325) 16(3.55,0.325) 17(3.55,0.975) 18(3.55,1.625) 19(3.55,2.275) 20(3.55,2.925)
  silkscreen extent -4.45,-3.6 2.3,3.6, body extent -4.03,-3.6 3.77,3.6, height 1.9
SSOP-48 [mm]
  rect 1.9x0.435 smd: 1(-4.75,7.302) 2(-4.75,6.668) 3(-4.75,6.032) 4(-4.75,5.398) 5(-4.75,4.762) 6(-4.75,4.128) 7(-4.75,3.492) 8(-4.75,2.858) 9(-4.75,2.222) 10(-4.75,1.588) 11(-4.75,0.952) 12(-4.75,0.318) 13(-4.75,-0.318) 14(-4.75,-0.952) 15(-4.75,-1.588) 16(-4.75,-2.222) 17(-4.75,-2.858) 18(-4.75,-3.492) 19(-4.75,-4.128) 20(-4.75,-4.762) 21(-4.75,-5.398) 22(-4.75,-6.032) 23(-4.75,-6.668) 24(-4.75,-7.302) 25(4.75,-7.302) 26(4.75,-6.668) 27(4.75,-6.032) 28(4.75,-5.398) 29(4.75,-4.762) 30(4.75,-4.128) 31(4.75,-3.492) 32(4.75,-2.858) 33(4.75,-2.222) 34(4.75,-1.588) 35(4.75,-0.952) 36(4.75,-0.318) 37(4.75,0.318) 38(4.75,0.952) 39(4.75,1.588) 40(4.75,2.222) 41(4.75,2.858) 42(4.75,3.492) 43(4.75,4.128) 44(4.75,4.762) 45(4.75,5.398) 46(4.75,6.032) 47(4.75,6.668) 48(4.75,7.302)
  silkscreen extent -5.7,-7.94 3.45,7.94, body extent -5.18,-7.94 5.18,7.94, height 2.58
TP [mm] "Test Point"
  rect 1.5x1.5 hole 0.9: 1(0,0)
  silkscreen extent -1.27,-1.27 1.27,1.27

## Part data
B1 B2: "Flip Flops Octal D-type flip-flops with clear with Schmitt-trigger inputs", Manufacturer_Name="Texas Instruments", Mouser Part Number=595-SN74HCS273PWR, Datasheet Link=https://www.ti.com/general/docs/suppproductinfo.tsp?distId=26&gotoUrl=https://www.ti.com/lit/gpn/sn74hcs273, Geometry.Height=1.2mm, Manufacturer_Part_Number=SN74HCS273PWR, Mouser Price/Stock=https://www.mouser.co.uk/ProductDetail/Texas-Instruments/SN74HCS273PWR?qs=QNEnbhJQKvYIJo9rBWLKyw%3D%3D
C8 C11: library part CL10B104JB8NNNC, "Samsung Electro-Mechanics 0603 100nf"
C9: library part CL10B102KB8NNNL, "Samsung Electro-Mechanics 0603 1nf"
C10: library part CL10B105KA8NNNL, "Samsung Electro-Mechanics 0603 1uf"
D1: library part S3AFGHM3/I, "Rectifiers VR=400V, IO=3A", Manufacturer_Name="Comchip Technology", Manufacturer_Part_Number=1N4001-G, Mouser Part Number=750-1N4001-G, Datasheet Link=https://datasheet.datasheetarchive.com/originals/distributors/Datasheets-7/DSA-138621.pdf, Mouser Price/Stock=https://www.mouser.co.uk/ProductDetail/Comchip-Technology/1N4001-G?qs=2qJf6qQ4IOKJYZQUWvVExw%3D%3D
IC1: "Integrated Circuit", Manufacturer_Name=Microchip, Manufacturer_Part_Number="AVR64DD32-I/PT | MULTI-VOLTAGE I/O", Datasheet Link=https://www.microchip.com/en-us/product/AVR64DD32, Height=1.2mm
J1: "Connector", Manufacturer_Name="Phoenix Contact", Mouser Part Number=651-1803439, Arrow Part Number=1803439, Arrow Price/Stock=https://www.arrow.com/en/products/1803439/phoenix-contact?region=nac, Datasheet Link=http://uk.rs-online.com/web/p/products/2204838, Manufacturer_Part_Number=1803439, Mouser Price/Stock=https://www.mouser.co.uk/ProductDetail/Phoenix-Contact/1803439?qs=ChwaSN6Xm4%2FKqu7eZUAe4w%3D%3D
J2 J3 J5 J6: "Molex C-GRID 70246, 2.54mm Pitch, 16 Way, 2 Row, Straight PCB Header, Through Hole", Manufacturer_Name=Molex, Mouser Part Number=538-70246-1604, Datasheet Link=https://www.molex.com/pdm_docs/sd/702461604_sd.pdf, Geometry.Height=9.27mm, Manufacturer_Part_Number=70246-1604, Mouser Price/Stock=https://www.mouser.co.uk/ProductDetail/Molex/70246-1604?qs=KUIzHt%2Fe91njhb67Cjmalw%3D%3D
J4 J8: library part Jumper, "16 Pin 3x8 Through Hold Jumprts", Color=Black, Manufacturer=Samtec, Manufacturer Part Number=TST-108-01-G-D, Max Operating Temperature=125°C, Min Operating Temperature=-55°C, Category="Headers and Wire Housings", ComponentLink1Description=https://datasheet.ciiva.com/739/tst-mkt-739845.pdf?src-supplier=Digi-Key, ComponentLink1URL=https://datasheet.ciiva.com/739/tst-mkt-739845.pdf?src-supplier=Digi-Key, ComponentLink2Description=https://datasheet.ciiva.com/10018/htst-10018510.pdf?src-supplier=Avnet, ComponentLink2URL=https://datasheet.ciiva.com/10018/htst-10018510.pdf?src-supplier=Avnet, Connector Type="Male Pin", Contact Material=Bronze, Contact Mating Length=0.25inch, Contact Plating=Gold, Depth=9.27mm, Gender=Male, Housing Color=Black, Housing Material=Polyester, Length=27.94mm, Mount="Through Hole", Number of Contacts=16, Number of Positions=16, Number of Rows=2, Orientation=Straight, Packaging=Rail/Tube, Pitch=2.54mm, Pricing 1="1=2.85000, 10=2.73600, 100=2.28000, 500=1.93800, 1000=1.65300, 5000=1.48200 (USD)", REACH SVHC="No SVHC", RoHS=Yes, Row Spacing=0.1inch, Stock 1=227, Supplier 1=Digi-Key, Termination=Solder
J7: "Phoenix Contact MCV Series, 5.08mm Pitch 2 Way Base Strip, Solder Termination, 8A", Manufacturer_Name="Phoenix Contact", Mouser Part Number=651-1836299, Datasheet Link=https://www.phoenixcontact.com/en-in/products/pcb-header-mcv-15-2-g-508-1836299, Geometry.Height=9.35mm, Manufacturer_Part_Number=1836299, Mouser Price/Stock=https://www.mouser.co.uk/ProductDetail/Phoenix-Contact/1836299?qs=W3wJikR1%252BS4CgO2c38K3Tg%3D%3D
J9: library part 1734035-4, "USB Micro Connector SMD", Manufacturer_Name="TE Connectivity", Mouser2 Part Number=571-1734035-4, Datasheet Link=https://componentsearchengine.com//1734035-4.pdf, Manufacturer_Part_Number=1734035-4, Mouser2 Price/Stock=https://www.mouser.com/Search/Refine.aspx?Keyword=571-1734035-4
LED1 LED2 LED3 LED4 LED5 LED6 LED7 LED8 LED14 LED15 LED16 LED17 LED18 LED19 LED20 LED21 LED22 LED23 LED37: library part 150060GS75000, "Wurth Elektronik 0603 green", Case Code (Imperial)=0603, Case Code (Metric)=1608, Color=Green, Forward Current=30mA, Forward Voltage=3.2V, Manufacturer="Wurth Electronics", Max Operating Temperature=85°C, Min Operating Temperature=-40°C, Package Quantity=4000, Test Current=20mA, Case/Package=0603, Category=LEDs, ComponentLink1Description=https://datasheet.ciiva.com/29562/150060gs75000-29562868.pdf?src-supplier=Digi-Key, ComponentLink1URL=https://datasheet.ciiva.com/29562/150060gs75000-29562868.pdf?src-supplier=Digi-Key, ComponentLink2Description=https://datasheet.ciiva.com/29279/759427-da-01-en-chipled-0603-w-kl-gruen-150060gs75000-29279201.pdf?src-supplier=Conrad, ComponentLink2URL=https://datasheet.ciiva.com/29279/759427-da-01-en-chipled-0603-w-kl-gruen-150060gs75000-29279201.pdf?src-supplier=Conrad, ComponentLink3Description=https://datasheet.ciiva.com/29562/150060gs75000-29562869.pdf?src-supplier=Digi-Key, ComponentLink3URL=https://datasheet.ciiva.com/29562/150060gs75000-29562869.pdf?src-supplier=Digi-Key, ComponentLink4Description=https://datasheet.ciiva.com/29562/150060gs75000-29562870.pdf?src-supplier=Digi-Key, ComponentLink4URL=https://datasheet.ciiva.com/29562/150060gs75000-29562870.pdf?src-supplier=Digi-Key, Dominant Wavelength=520nm, Height=0.7mm, Lead Free="Lead Free", Length=1.6mm, Lens Style=Clear,Rectangular, Luminous Intensity=430mcd, Manufacturer Part Number=150060GS75000, Mount="Surface Mount", Packaging="Tape and Reel", Pricing 1="1=0.14000, 50=0.13300, 100=0.11400, 500=0.09900 (USD)", REACH SVHC=Unknown, RoHS=Yes, Stock 1=71509, Supplier 1=Digi-Key, Viewing Angle=140°, Wavelength=520nm, Width=0.8mm
LED9 LED10 LED11 LED12 LED13: library part 150060BS75000, "Wurth Elektronik 0603 blue", Case Code (Imperial)=0603, Case Code (Metric)=1608, Color=Green, Forward Current=30mA, Forward Voltage=3.2V, Manufacturer="Wurth Electronics", Manufacturer Part Number=150060GS75000, Max Operating Temperature=85°C, Min Operating Temperature=-40°C, Package Quantity=4000, Test Current=20mA, Case/Package=0603, Category=LEDs, ComponentLink1Description=https://datasheet.ciiva.com/29562/150060gs75000-29562868.pdf?src-supplier=Digi-Key, ComponentLink1URL=https://datasheet.ciiva.com/29562/150060gs75000-29562868.pdf?src-supplier=Digi-Key, ComponentLink2Description=https://datasheet.ciiva.com/29279/759427-da-01-en-chipled-0603-w-kl-gruen-150060gs75000-29279201.pdf?src-supplier=Conrad, ComponentLink2URL=https://datasheet.ciiva.com/29279/759427-da-01-en-chipled-0603-w-kl-gruen-150060gs75000-29279201.pdf?src-supplier=Conrad, ComponentLink3Description=https://datasheet.ciiva.com/29562/150060gs75000-29562869.pdf?src-supplier=Digi-Key, ComponentLink3URL=https://datasheet.ciiva.com/29562/150060gs75000-29562869.pdf?src-supplier=Digi-Key, ComponentLink4Description=https://datasheet.ciiva.com/29562/150060gs75000-29562870.pdf?src-supplier=Digi-Key, ComponentLink4URL=https://datasheet.ciiva.com/29562/150060gs75000-29562870.pdf?src-supplier=Digi-Key, Dominant Wavelength=520nm, Height=0.7mm, Lead Free="Lead Free", Length=1.6mm, Lens Style=Clear,Rectangular, Luminous Intensity=430mcd, Mount="Surface Mount", Packaging="Tape and Reel", Pricing 1="1=0.14000, 50=0.13300, 100=0.11400, 500=0.09900 (USD)", REACH SVHC=Unknown, RoHS=Yes, Stock 1=71509, Supplier 1=Digi-Key, Viewing Angle=140°, Wavelength=520nm, Width=0.8mm
LED24 LED25 LED26 LED38: library part 150060RS75000, "Wurth Elektronik 0603 red", Case Code (Imperial)=0603, Case Code (Metric)=1608, Color=Green, Forward Current=30mA, Forward Voltage=3.2V, Manufacturer="Wurth Electronics", Manufacturer Part Number=150060GS75000, Max Operating Temperature=85°C, Min Operating Temperature=-40°C, Package Quantity=4000, Test Current=20mA, Case/Package=0603, Category=LEDs, ComponentLink1Description=https://datasheet.ciiva.com/29562/150060gs75000-29562868.pdf?src-supplier=Digi-Key, ComponentLink1URL=https://datasheet.ciiva.com/29562/150060gs75000-29562868.pdf?src-supplier=Digi-Key, ComponentLink2Description=https://datasheet.ciiva.com/29279/759427-da-01-en-chipled-0603-w-kl-gruen-150060gs75000-29279201.pdf?src-supplier=Conrad, ComponentLink2URL=https://datasheet.ciiva.com/29279/759427-da-01-en-chipled-0603-w-kl-gruen-150060gs75000-29279201.pdf?src-supplier=Conrad, ComponentLink3Description=https://datasheet.ciiva.com/29562/150060gs75000-29562869.pdf?src-supplier=Digi-Key, ComponentLink3URL=https://datasheet.ciiva.com/29562/150060gs75000-29562869.pdf?src-supplier=Digi-Key, ComponentLink4Description=https://datasheet.ciiva.com/29562/150060gs75000-29562870.pdf?src-supplier=Digi-Key, ComponentLink4URL=https://datasheet.ciiva.com/29562/150060gs75000-29562870.pdf?src-supplier=Digi-Key, Dominant Wavelength=520nm, Height=0.7mm, Lead Free="Lead Free", Length=1.6mm, Lens Style=Clear,Rectangular, Luminous Intensity=430mcd, Mount="Surface Mount", Packaging="Tape and Reel", Pricing 1="1=0.14000, 50=0.13300, 100=0.11400, 500=0.09900 (USD)", REACH SVHC=Unknown, RoHS=Yes, Stock 1=71509, Supplier 1=Digi-Key, Viewing Angle=140°, Wavelength=520nm, Width=0.8mm
LED27 LED28 LED29 LED30 LED31 LED33 LED34 LED36: library part 150060AS75000, "Wurth Elektronik 0603 amber", Case Code (Imperial)=0603, Case Code (Metric)=1608, Color=Green, Forward Current=30mA, Forward Voltage=3.2V, Manufacturer="Wurth Electronics", Manufacturer Part Number=150060GS75000, Max Operating Temperature=85°C, Min Operating Temperature=-40°C, Package Quantity=4000, Test Current=20mA, Case/Package=0603, Category=LEDs, ComponentLink1Description=https://datasheet.ciiva.com/29562/150060gs75000-29562868.pdf?src-supplier=Digi-Key, ComponentLink1URL=https://datasheet.ciiva.com/29562/150060gs75000-29562868.pdf?src-supplier=Digi-Key, ComponentLink2Description=https://datasheet.ciiva.com/29279/759427-da-01-en-chipled-0603-w-kl-gruen-150060gs75000-29279201.pdf?src-supplier=Conrad, ComponentLink2URL=https://datasheet.ciiva.com/29279/759427-da-01-en-chipled-0603-w-kl-gruen-150060gs75000-29279201.pdf?src-supplier=Conrad, ComponentLink3Description=https://datasheet.ciiva.com/29562/150060gs75000-29562869.pdf?src-supplier=Digi-Key, ComponentLink3URL=https://datasheet.ciiva.com/29562/150060gs75000-29562869.pdf?src-supplier=Digi-Key, ComponentLink4Description=https://datasheet.ciiva.com/29562/150060gs75000-29562870.pdf?src-supplier=Digi-Key, ComponentLink4URL=https://datasheet.ciiva.com/29562/150060gs75000-29562870.pdf?src-supplier=Digi-Key, Dominant Wavelength=520nm, Height=0.7mm, Lead Free="Lead Free", Length=1.6mm, Lens Style=Clear,Rectangular, Luminous Intensity=430mcd, Mount="Surface Mount", Packaging="Tape and Reel", Pricing 1="1=0.14000, 50=0.13300, 100=0.11400, 500=0.09900 (USD)", REACH SVHC=Unknown, RoHS=Yes, Stock 1=71509, Supplier 1=Digi-Key, Viewing Angle=140°, Wavelength=520nm, Width=0.8mm
R1 R2 R3 R106: library part RC0603JR-0710KL, "YAGEO 0603 10k ohm", Manufacturer_Name=KEMET, Manufacturer_Part_Number=RC0603JR-070RL, Mouser Part Number=603-RC0603JR-070RL, Datasheet Link=https://datasheet.datasheetarchive.com/originals/distributors/Datasheets_SAMA/902f9e387b938f871d31120f5fc1d65e.pdf, Geometry.Height=0.55mm, Mouser Price/Stock=https://www.mouser.co.uk/ProductDetail/YAGEO/RC0603JR-070RL?qs=2cAdsCoAWRGWyPcuXgGiXQ%3D%3D
R4 R5 R6 R7 R8 R9 R10 R11 R12 R13 R14 R15 R16 R17 R18 R19 R20 R21 R22 R23 R24 R25 R26 R27 R28 R29 R30 R31 R32 R33 R34 R35 R36 R37 R38 R39 R40 R41 R42 R43 R44 R45 R46 R47 R48 R49 R50 R51 R52 R53 R54 R55 R56 R57 R87 R88 R89 R94 R95 R96 R97 R98 R99 R100 R101 R102 R107 R108 R109 R110 R111 R112 R113 R114 R115 R116 R117 R118 R119 R120 R121 R122 R123 R124 R125 R126 R127 R128 R129 R130 R131 R132 R133 R134 R135 R136 R137 R138 R139 R141: library part RC0603JR-070RL, "YAGEO 0603 0 ohm", Manufacturer_Name=KEMET, Mouser Part Number=603-RC0603JR-070RL, Datasheet Link=https://datasheet.datasheetarchive.com/originals/distributors/Datasheets_SAMA/902f9e387b938f871d31120f5fc1d65e.pdf, Geometry.Height=0.55mm, Manufacturer_Part_Number=RC0603JR-070RL, Mouser Price/Stock=https://www.mouser.co.uk/ProductDetail/YAGEO/RC0603JR-070RL?qs=2cAdsCoAWRGWyPcuXgGiXQ%3D%3D
R58 R59 R60 R61 R62 R63 R64 R65 R66 R67 R68 R69 R70 R71 R72 R73 R74 R75 R76 R77 R78 R79 R80 R103 R105: library part RC0603FR-104K7L, "YAGEO 0603 4.7k", Manufacturer_Name=KEMET, Manufacturer_Part_Number=RC0603JR-070RL, Mouser Part Number=603-RC0603JR-070RL, Datasheet Link=https://datasheet.datasheetarchive.com/originals/distributors/Datasheets_SAMA/902f9e387b938f871d31120f5fc1d65e.pdf, Geometry.Height=0.55mm, Mouser Price/Stock=https://www.mouser.co.uk/ProductDetail/YAGEO/RC0603JR-070RL?qs=2cAdsCoAWRGWyPcuXgGiXQ%3D%3D
R81 R82 R83 R84 R85 R86 R90 R91 R92 R93 R104 R140: library part AC0603FR-7W1KL_1, "YAGEO 0603 1k ohm", Manufacturer_Name=KEMET, Manufacturer_Part_Number=RC0603JR-070RL, Mouser Part Number=603-RC0603JR-070RL, Datasheet Link=https://datasheet.datasheetarchive.com/originals/distributors/Datasheets_SAMA/902f9e387b938f871d31120f5fc1d65e.pdf, Geometry.Height=0.55mm, Mouser Price/Stock=https://www.mouser.co.uk/ProductDetail/YAGEO/RC0603JR-070RL?qs=2cAdsCoAWRGWyPcuXgGiXQ%3D%3D
TP1 TP6 TP7 TP8 TP9: Color=Black, Manufacturer=Samtec, Manufacturer Part Number=TST-105-01-G-D, Max Operating Temperature=125°C, Min Operating Temperature=-55°C, Category="Headers and Wire Housings", ComponentLink1Description=https://datasheet.ciiva.com/739/tst-mkt-739845.pdf?src-supplier=Digi-Key, ComponentLink1URL=https://datasheet.ciiva.com/739/tst-mkt-739845.pdf?src-supplier=Digi-Key, ComponentLink2Description=https://datasheet.ciiva.com/10018/htst-10018510.pdf?src-supplier=Avnet, ComponentLink2URL=https://datasheet.ciiva.com/10018/htst-10018510.pdf?src-supplier=Avnet, Connector Type="Male Pin", Contact Material=Bronze, Contact Mating Length=0.25inch, Contact Plating=Gold, Depth=9.27mm, Gender=Male, Housing Color=Black, Housing Material=Polyester, Length=27.94mm, Mount="Through Hole", Number of Contacts=16, Number of Positions=16, Number of Rows=2, Orientation=Straight, Packaging=Rail/Tube, Pitch=2.54mm, Pricing 1="1=2.85000, 10=2.73600, 100=2.28000, 500=1.93800, 1000=1.65300, 5000=1.48200 (USD)", REACH SVHC="No SVHC", RoHS=Yes, Row Spacing=0.1inch, Stock 1=227, Supplier 1=Digi-Key, Termination=Solder
U1 U7: "16-Bit Buffers/Drivers with 3-State Outputs", Manufacturer_Name="Texas Instruments", Mouser Part Number=595-CY74FCT16244TPVC, Datasheet Link=http://www.ti.com/lit/gpn/CY74FCT16244T, Geometry.Height=2.79mm, Manufacturer_Part_Number=CY74FCT16244TPVC, Mouser Price/Stock=https://www.mouser.co.uk/ProductDetail/Texas-Instruments/CY74FCT16244TPVC?qs=vul0MlC%2Fa1eu%2FYdtT7AvpQ%3D%3D
U2 U3 U4 U5: "Octal Buffers/Drivers With 3-State Outputs", Manufacturer_Name="Texas Instruments", Mouser Part Number=595-SN74ABT240ADBR, Datasheet Link=http://www.ti.com/lit/gpn/sn74abt240a, Geometry.Height=2mm, Manufacturer_Part_Number=SN74ABT240ADBR, Mouser Price/Stock=https://www.mouser.co.uk/ProductDetail/Texas-Instruments/SN74ABT240ADBR?qs=JHHQeKcAU3Dt82k%252BVyiYdw%3D%3D
U6: "USB-Serial SMD", Manufacturer_Name="FTDI Chip", Datasheet Link=http://www.ftdichip.com/Support/Documents/DataSheets/ICs/DS_FT232R.pdf, Height=2mm, Manufacturer_Part_Number=FT232RL-REEL
X1: "Sub miniature slide switches", Manufacturer_Name="C & K COMPONENTS", Mouser Part Number=611-JS202011SCQN, Datasheet Link=http://www.ckswitches.com/media/1422/js.pdf, Geometry.Height=5.5mm, Manufacturer_Part_Number=JS202011SCQN, Mouser Price/Stock=https://www.mouser.co.uk/ProductDetail/CK/JS202011SCQN?qs=LgMIjt8LuD95JYWxZ7NvZA%3D%3D

## Free pads (board coordinates)
  round 200 hole 170: 37(200,200) 37(200,3800) 37(5400,200) 37(5400,3800)

## Via types
v1: diameter 50, hole 28, Top Layer to Bottom Layer, 214 vias

## Nets (pads, with @x,y where several pads share a name; then routed paths per layer and width w, separated by ;. In a path a pad name is that pad's centre, name@x,y a point inside that pad or via, vN(x,y) a via of type N, cw(c..) or ccw(c..) an arc to the next point about the centre after c; other vN are vias at no path point)
+3V3: R102.2 TP6.1 | length 138.5
  Top Layer w10: TP6.1@270,610 R102.2@408.5,610
+5: B1.20 B2.20 C8.1 C9.1 C10.1 C11.1 D1.1 IC1.10 IC1.18 IC1.28 J1.1 J5.1 J8.1 R1.2 R2.2 R3.2 R58.2 R59.2 R60.2 R61.2 R62.2 R63.2 R64.2 R65.2 R66.2 R67.2 R68.2 R69.2 R70.2 R71.2 R72.2 R73.2 R74.2 R75.2 R76.2 R77.2 R78.2 R79.2 R80.2 R81.2 R82.2 R83.2 R84.2 R85.2 R86.2 R90.2 R91.2 R92.2 R93.2 R103.2 R104.2 R140.2 TP7.1 U1.7 U1.18 U1.31 U1.42 U2.20 U3.20 U4.20 U5.20 U6.4 U6.20 U7.7 U7.18 U7.31 U7.42 | length 9505.6
  Top Layer w10: J8.1@100,2070 401.5,2070 R104.2@410,2078.5 ; v1(120,1680) 170.43,1629.57 U6.4@262.2,1629.57 ; v1(390,1500) 391.61,1501.61 U6.20@537.8,1501.61 ; U4.20@739.76,2815.16 845.16,2815.16 860,2830 v1(860,2880) ; U2.20@1539.76,2815.16 1646.87,2815.16 1660,2828.28 v1(1660,2890) ; U7.42@1562.99,1882.52 v1(1700,1882.52) U7.7@1937.01,1882.52 ; U7.31@1562.99,2157.48 v1(1700,2157.48) U7.18@1937.01,2157.48 ; U1.18@1572.99,912.52 v1(1700,912.52) U1.31@1947.01,912.52 ; U1.7@1572.99,1187.48 v1(1700,1187.48) U1.42@1947.01,1187.48 ; U3.20@2539.76,2815.16 2644.14,2815.16 2650,2821.02 v1(2650,2900) ; B2.20@3565.67,1165.16 3735.16,1165.16 v1(3740,1170) ; B1.20@3565.67,1785.16 3566.14,1785.16 3570,1789.02 v1(3570,1880) ; U5.20@3639.76,2825.16 3755.16,2825.16 3780,2850 v1(3780,2900) ; IC1.10@4721.26,1403.15 4721.26,1500.44 4740,1519.18 v1(4740,1530) 4747.07,1522.93 4782.93,1522.93 ; IC1.28@4815.75,1736.85 4815.75,1555.75 4782.93,1522.93 ; IC1.18@4966.85,1491.26 4960.04,1498.07 4938.89,1498.07 4936.96,1500 4805.86,1500 4794.39,1511.46 4782.93,1522.93 ; R1.2@5360,1641.5 R2.2@5420,1641.5 ; v1(5420,1720) R2.2@5420,1641.5 ; 5450,2690 5460,2680 ; R3.2@5480,1641.5 R2.2@5420,1641.5
  Top Layer w40: D1.1@5100,2900 5100,2713.43 5123.43,2690 5450,2690 J1.1@5450,2450
  Bottom Layer w10: v1(450,3160) R80.2@450,3357.01 451.5,3358.5 R79.2@550,3358.5 R78.2@650,3358.5 R77.2@750,3358.5 R75.2@950,3358.5 R74.2@1050,3358.5 ; v1(1150,3160) R65.2@1150,3358.5 R64.2@1250,3358.5 R63.2@1350,3358.5 R62.2@1450,3358.5 R61.2@1550,3358.5 R60.2@1650,3358.5 R59.2@1750,3358.5 R58.2@1850,3358.5 ; v1(2030,3200) R73.2@2030,3358.5 R72.2@2130,3358.5 R71.2@2230,3358.5 R70.2@2330,3358.5 R69.2@2430,3358.5 R68.2@2530,3358.5 R67.2@2630,3358.5 R66.2@2730,3358.5 ; R81.2@2900,3358.5 R82.2@3000,3358.5 R83.2@3100,3358.5 R84.2@3200,3358.5 R85.2@3300,3358.5 3378.5,3358.5 v1(3380,3360) ; R90.2@3580,3358.5 R86.2@3680,3358.5 R91.2@3780,3358.5 R92.2@3880,3358.5 R93.2@3980,3358.5 3981.5,3360 v1(4230,3360) ; C10.1@4630,1478.5 4630,1415.86 4635.86,1410 4712.18,1410 ; C11.1@4771.5,1740 4820,1740 ; C9.1@4788.5,1410 4712.18,1410 ; C8.1@4970,1631.5 4970,1730 4960,1740 ; v1(5050,1830) 5050,1820 4970,1740 4960,1740 ; 4712.18,1410 4712.18,1501.25 4740,1529.07 v1(4740,1530) 4747.65,1522.35 4777.65,1522.35 4820,1564.69 4820,1740 ; 4820,1740 4960,1740
A0: J6.14 R7.2 R88.1 U2.2 | length 4470
  Top Layer w10: v1(1040,1520) 1040,1465.86 1045.86,1460 R7.2@1123.5,1460 ; v1@1060,1520 R88.1@1128.5,1520 ; v1(1130,2820) 1160,2790 1259.8,2790 U2.2@1260.24,2789.57
  Bottom Layer w10: v1(1040,1520) 980.86,1520 975,1525.86 975,1894.14 980.86,1900 1084.14,1900 1090,1905.86 1090,2280 1090.86,2280.86 1090.86,2539.14 1131.72,2580 1205,2653.28 1205,2814.14 1199.14,2820 v1(1130,2820) ; v1@1060,1520 1544.14,1520 1580,1484.14 1580,520 1590,510 2394.14,510 2400,504.14 J6.14@2400,300
A1: J6.12 R11.2 R98.1 U2.4 | length 4672.5
  Top Layer w10: v1@1005.86,1405 1000,1410.86 1000,1574.14 1005.86,1580 R98.1@1128.5,1580 ; v1(1010,1405) 1118.5,1405 R11.2@1123.5,1400 ; v1(1040,2740) 1258.62,2740 U2.4@1260.24,2738.39
  Bottom Layer w10: v1(1040,2740) 1184.14,2740 1190,2734.14 1190,2659.5 1125.5,2595 1075,2544.5 1075,1960 1045,1930 982.43,1930 960,1907.57 960,1410.86 965.86,1405 v1(1010,1405) 1549.14,1405 1565,1389.14 1565,505 1580,490 2294.14,490 2300,484.14 J6.12@2300,300
A2: J6.10 R15.2 R100.1 U2.6 | length 4458
  Top Layer w10: R15.2@1123.5,1340 v1(1040,1340) 985.86,1340 970,1355.86 970,1630 980,1640 R100.1@1128.5,1640 ; v1(1140,2690) 1141.4,2688.6 1258.84,2688.6 U2.6@1260.24,2687.2
  Bottom Layer w10: v1(1140,2690) 1140,2640 1055,2555 1055,1965 1035,1945 976.21,1945 945,1913.79 945,1350 955,1340 v1(1040,1340) 1544.14,1340 1550,1334.14 1550,488.28 1563.28,475 2194.14,475 2200,469.14 J6.10@2200,300
A3: J6.8 R19.2 R114.1 U2.8 | length 4526.2
  Top Layer w10: v1(1040,2640) 1043.98,2636.02 U2.8@1260.24,2636.02 ; R19.2@1123.5,1280 1015,1280 v1(1010,1275) 1015,1275 1010,1270 1002.35,1277.65 982.65,1277.65 955,1305.31 955,1694.14 960.86,1700 R114.1@1128.5,1700
  Bottom Layer w10: v1(1010,1275) 940.86,1275 930,1285.86 930,1920 970,1960 1024.14,1960 1040,1975.86 v1(1040,2640) ; v1@1028.21,1277.5 1516.64,1277.5 1535,1259.14 1535,475 1550,460 2094.14,460 2100,454.14 J6.8@2100,300
A4: J6.6 R23.2 R116.1 U2.11 | length 5662.4
  Top Layer w10: v1(710,2270) 625.97,2270 620.11,2275.86 620.11,2499.14 625.97,2505 1594.14,2505 1600,2510.86 1600,2578.98 1594.14,2584.84 U2.11@1539.76,2584.84 ; R23.2@1122.9,1219.4 1060.22,1219.4 1050.82,1210 960,1210 940,1230 940,1754.14 945.86,1760 R116.1@1128.5,1760
  Bottom Layer w10: v1(710,2270) 680.86,2270 675,2264.14 675,1225.86 690.86,1210 v1(1040,1210) 1047.65,1217.65 1063.51,1217.65 1065.86,1220 1514.14,1220 1520,1214.14 1520,450.86 1525.86,445 1994.14,445 2000,439.14 J6.6@2000,300
A5: J6.4 R27.2 R118.1 U2.13 | length 5541.9
  Top Layer w10: v1(760,2450) 800,2490 1614.14,2490 1620,2495.86 1620,2630.17 1614.14,2636.02 U2.13@1539.76,2636.02 ; v1@990.82,1159.18 v1(990,1160) ; R27.2@1123.5,1160 1122.68,1160.82 990.82,1160.82 v1(990,1160) ; R118.1@1128.5,1820 940,1820 925,1805 925,1190.86 950,1165.86 984.14,1165.86 v1(990,1160)
  Bottom Layer w10: v1(760,2450) 760,2410 660,2310 660,1165.86 665.86,1160 v1(990,1160) 1479.14,1160 1500,1139.14 1500,435.86 1505.86,430 1894.14,430 1900,424.14 J6.4@1900,300
A6: J6.2 R31.2 R120.1 U2.15 | length 5733.4
  Top Layer w10: v1(670,2390) 785.86,2390 863.79,2467.93 1627.07,2467.93 1640,2480.86 1640,2681.35 1634.14,2687.2 U2.15@1539.76,2687.2 ; R31.2@1123.5,1100 v1(1040,1100) 960.86,1100 910,1150.86 910,1874.14 915.86,1880 R120.1@1128.5,1880
  Bottom Layer w10: v1(670,2390) 670,2380 640,2350 640,1110 650,1100 1470,1100 1480,1090 1480,420.86 1485.86,415 1794.14,415 1800,409.14 J6.2@1800,300
A7: J3.16 R35.2 R122.1 U2.17 | length 5630.2
  Top Layer w10: v1(720,1040) 730,1040 760,1070 760,2342.93 870,2452.93 1657.07,2452.93 1670,2465.86 1670,2730 1661.61,2738.39 U2.17@1539.76,2738.39 ; R35.2@1123.5,1040 v1(980,1040) 960,1040 895,1105 895,1934.14 900.86,1940 R122.1@1128.5,1940
  Bottom Layer w10: v1(720,1040) v1(980,1040) 1449.14,1040 1465,1024.14 1465,445.86 1459.14,440 1320,440 1300,420 J3.16@1300,300
A8: J3.14 R37.2 R124.1 U4.2 | length 4655.5
  Top Layer w10: U4.2@460.24,2789.57 539.14,2789.57 545,2795.42 545,2984.14 519.14,3010 v1(470,3010) ; R37.2@1123.5,980 v1(1040,980) 950,980 880,1050 880,1990 890,2000 v1(960,2000) R124.1@1128.5,2000
  Bottom Layer w10: v1(470,3010) 930,3010 990,2950 990,2215.16 960,2185.16 v1(960,2000) ; v1(1040,980) 1444.14,980 1450,974.14 1450,465.86 1444.14,460 1220,460 1200,440 J3.14@1200,300
A9: J3.12 R39.2 R126.1 U4.4 | length 5809.4
  Top Layer w10: v1(230,2740) 230.81,2739.19 459.43,2739.19 U4.4@460.24,2738.39 ; v1(940,920) 865,995 865,2054.14 870.86,2060 R126.1@1128.5,2060 ; v1@950,920 R39.2@1123.5,920
  Bottom Layer w10: v1(230,2740) 610,2740 620,2730 620,908.28 627.07,901.21 861.21,901.21 880,920 v1(940,920) 1424.14,920 1430,914.14 1430,485.86 1424.14,480 1110,480 1100,470 J3.12@1100,300
A10: J3.10 R41.2 R128.1 U4.6 | length 5697
  Top Layer w10: v1(360,2690) 361.4,2688.6 458.84,2688.6 U4.6@460.24,2687.2 ; R128.1@1118.5,2110 R128.1@1128.5,2120 855.86,2120 850,2114.14 850,940 930,860 v1(1000,860) R41.2@1123.5,860
  Bottom Layer w10: v1(360,2690) 599.14,2690 605,2684.14 605,896.21 620.61,880.61 899.39,880.61 920,860 v1(1000,860) 1409.14,860 1415,854.14 1415,510.86 1404.14,500 1010,500 1000,490 J3.10@1000,300
A11: J3.8 R44.2 R130.1 U4.8 | length 5952.6
  Top Layer w10: v1(290,2630) 296.02,2636.02 U4.8@460.24,2636.02 ; R44.2@1123.5,800 v1(1060,800) 920,800 835,885 835,2174.14 840.86,2180 R130.1@1128.5,2180
  Bottom Layer w10: v1(290,2630) 584.14,2630 590,2624.14 590,890 620,860 860,860 920,800 v1(1060,800) 1394.14,800 1400,794.14 1400,525.86 1394.14,520 910,520 900,510 J3.8@900,300
A12: J3.6 R47.2 R132.1 U4.11 | length 4059.6
  Top Layer w10: U4.11@739.76,2584.84 824.84,2584.84 v1(830,2590) ; R47.2@1123.5,740 970,740 930,780 v1(870,780) 830,780 820,790 820,2230 830,2240 v1(860,2240) R132.1@1128.5,2240
  Bottom Layer w10: J3.6@800,300 800,510 830,540 1374.14,540 1380,545.86 1380,734.14 1374.14,740 970,740 930,780 v1(870,780) ; v1(830,2590) 830,2260 850,2240 v1(860,2240)
A13: J3.4 R50.2 R134.1 U4.13 | length 3568.1
  Top Layer w10: U4.13@739.76,2636.02 886.02,2636.02 v1(890,2640) ; 805,2290 805,725 820,710 v1(870,710) 1050,710 1080,680 R50.2@1123.5,680 ; 805,2295 805,2304.14 807.93,2307.07 1121.43,2307.07 R134.1@1128.5,2300
  Bottom Layer w10: J3.4@700,300 700,550 710,560 1014.14,560 1020,565.86 1020,670 980,710 v1(870,710) ; v1(890,2310) v1(890,2640)
A14: J3.2 R53.2 R136.1 U4.15 | length 3451.7
  Top Layer w10: U4.15@739.76,2687.2 827.2,2687.2 v1(830,2690) ; R53.2@1123.5,620 v1(870,620) 800,620 790,630 790,2330.5 819.5,2360 R136.1@1128.5,2360
  Bottom Layer w10: J3.2@600,300 670,370 670,600 690,620 v1(870,620) ; v1(830,2690) 930,2690 940,2680 v1(940,2360)
A15: J6.16 R55.2 R138.1 | length 4151.4
  Top Layer w10: R138.1@1128.5,2420 858.28,2420 775,2336.72 775,617.77 831.39,561.39 1122.12,561.39 R55.2@1123.5,560 1123.5,515.86 1129.36,510 1710,510 v1(1750,550)
  Bottom Layer w10: v1(1750,550) 2470,550 2500,520 J6.16@2500,300
Address_Read_High: R51.1 U7.24 U7.25 | length 4810.4
  Top Layer w10: U7.25@1562.99,2307.48 U7.24@1937.01,2307.48 1937.01,2417.01 2010,2490 2500,2490 2560,2430 2931.29,2430 2932.14,2429.14 2940.43,2429.14 2981.29,2470 3800,2470 3810,2460 v1(3810,2310) ; v1(4070,1110) 4660,1110 4670,1120 R51.1@4670,1198.5
  Bottom Layer w10: v1(3810,2310) 3802.35,2317.65 3786.49,2317.65 3784.14,2320 3655.86,2320 3650,2314.14 3650,2196.36 4003.79,1842.57 4003.79,1176.21 v1(4070,1110)
Address_Read_Low: R48.1 U7.1 U7.48 | length 5201.3
  Top Layer w10: U7.48@1562.99,1732.52 U7.1@1965.85,1732.52 ; v1(1950,1630) 1950,1728.96 U7.1@1953.56,1732.52 ; v1(2030,2440) 2065,2475 2475,2475 2540,2410 2942.5,2410 2987.5,2455 3720,2455 3760,2415 v1(3760,2150) ; v1(4110,1170) 4110,1160 4130,1140 4604.14,1140 4610,1145.86 R48.1@4610,1198.5
  Bottom Layer w10: v1(1950,1630) 1950,2430 1960,2440 v1(2030,2440) ; v1(3760,2150) 3760,2107.57 4018.79,1848.79 4018.79,1192.39 4041.17,1170 v1(4110,1170)
BOE#: R3.1 R33.2 R94.1 U1.1 U1.24 U1.25 U1.48 | length 9043.8
  Top Layer w10: U1.24@1572.99,762.52 1640,762.52 ; U1.1@1572.99,1337.48 1640,1337.48 ; v1(1640,700) 1640,762.52 ; v1(1640,1400) 1640,1337.48 ; U1.25@1947.01,762.52 1640,762.52 ; U1.48@1950,1340.47 U1.48@1947.01,1337.48 1640,1337.48 ; v1(4020,2820) R94.1@4020,2968.5 ; R33.2@5161.5,1480 5200,1480 v1(5250,1430) 5474.14,1430 5480,1435.86 R3.1@5480,1578.5
  Bottom Layer w10: v1(1640,700) v1(1640,1400) 1640,1694.14 1645.86,1700 1770,1700 1770,3049.14 1775.86,3055 4014.14,3055 4020,3049.14 v1(4020,2820) 4090,2820 4130,2860 5032.43,2860 5170,2722.43 5170,2430 5250,2350 5250,1728.79 5280,1698.79 5280,1630 5250,1600 v1(5250,1430)
D0: B1.3 B2.3 J2.2 R4.1 R89.2 R125.2 U3.2 | length 10962.4
  Top Layer w10: v1(2100,2840) 2150.43,2789.57 U3.2@2260.24,2789.57 ; R89.2@2386.5,1520 v1(2690,1520) ; R125.2@2386.5,2000 v1(2700,2000) 3360,2000 3390,1970 3390,1741.87 3382.1,1733.98 B1.3@3334.33,1733.98 ; v1(2700,2650) 3059.14,2650 3065,2644.14 3065,2535.86 3070.86,2530 4697.78,2530 4760,2467.78 R4.1@4760,1961.5 ; v1(3000,600) 3000,451.21 3006.21,445 3874.14,445 3905,475.86 3905,1295 3870,1330 3405.86,1330 3399.14,1323.28 3399.14,1119.83 3393.28,1113.98 B2.3@3334.33,1113.98
  Bottom Layer w10: v1(2100,2840) 2100,3024.14 2105.86,3030 2694.14,3030 2700,3024.14 v1(2700,2650) v1(2700,2000) ; v1@2690,2000 v1(2690,1520) 2939.14,1520 2945,1514.14 2945,655 v1(3000,600) J2.2@3000,300
D1: B1.4 B2.4 J2.4 R8.1 R99.2 R127.2 U3.4 | length 11308.3
  Top Layer w10: v1(2090,2740) 2258.62,2740 U3.4@2260.24,2738.39 ; R99.2@2386.5,1580 v1(2750,1580) ; R127.2@2386.5,2060 v1(2630,2060) v1(2750,2060) 3400,2060 3410,2050 3410,1715 3403.39,1708.39 B1.4@3334.33,1708.39 ; v1(2750,2590) 2790,2630 3044.14,2630 3050,2624.14 3050,2529.64 3064.64,2515 4691.57,2515 4717.07,2489.5 4717.07,2094.64 4700,2077.57 R8.1@4700,1961.5 ; v1(3100,600) 3100,465.86 3105.86,460 3840,460 3890,510 3890,1278.54 3853.54,1315 3420,1315 3414.14,1309.14 3414.14,1088.39 B2.4@3334.33,1088.39
  Bottom Layer w10: v1(2090,2740) 1910,2740 1900,2730 1900,2500 1910.61,2489.39 2084.14,2489.39 2090,2483.54 2090,2090 2120,2060 v1(2630,2060) ; v1(2750,2590) v1(2750,2060) v1(2750,1580) 2954.14,1580 2960,1574.14 2960,690 2990,660 3094.14,660 3100,654.14 v1(3100,600) 3100,414.14 ; 3094.14,420 3100,414.14 ; J2.4@3100,300 3100,414.14
D2: B1.7 B2.7 J2.6 R12.1 R101.2 R129.2 U3.6 | length 11034.7
  Top Layer w10: v1(1950,2690) 1951.4,2688.6 2258.84,2688.6 U3.6@2260.24,2687.2 ; R101.2@2386.5,1640 v1(2800,1640) ; R129.2@2386.5,2120 v1(2530,2120) v1(2800,2120) 3419.14,2120 3425,2114.14 3425,1645 3411.61,1631.61 B1.7@3334.33,1631.61 ; v1(2810,2530) 2810,2604.14 2815.86,2610 3024.14,2610 3030,2604.14 3030,2528.43 3058.43,2500 4685.36,2500 4702.07,2483.28 4702.07,2100.86 4640,2038.79 R12.1@4640,1961.5 ; v1(3200,600) 3200,510 3850,510 3875,535 3875,1272.32 3847.32,1300 3435,1300 3429.14,1294.14 3429.14,1026.61 3414.14,1011.61 B2.7@3334.33,1011.61
  Bottom Layer w10: v1(1950,2690) 1950,2510.25 1955.86,2504.39 2095.61,2504.39 2105,2495 2105,2130.86 2115.86,2120 v1(2530,2120) ; v1(2810,2530) 2805,2525 2805,2125 v1(2800,2120) v1(2800,1640) 2969.14,1640 2975,1634.14 2975,696.21 2996.21,675 3194.14,675 3200,669.14 v1(3200,600) J2.6@3200,300
D3: B1.8 B2.8 J2.8 R16.1 R115.2 R131.2 U3.8 | length 10636.2
  Top Layer w10: v1(2050,2640) 2053.98,2636.02 U3.8@2260.24,2636.02 ; R115.2@2386.5,1700 v1(2850,1700) ; R131.2@2386.5,2180 v1(2600,2180) v1(2850,2180) 3434.14,2180 3440,2174.14 3440,1611.88 3434.14,1606.02 B1.8@3334.33,1606.02 ; v1(2900,2550) 2987.22,2550 3052.22,2485 4679.14,2485 4687.07,2477.07 4687.07,2107.07 4610,2030 4590,2030 4580,2020 R16.1@4580,1961.5 ; v1(3300,600) 3300,550 3854.14,550 3860,555.86 3860,1266.11 3841.11,1285 3450,1285 3444.14,1279.14 3444.14,996.02 3434.14,986.02 B2.8@3334.33,986.02
  Bottom Layer w10: v1(2050,2640) 2050,2525.25 2055.86,2519.39 2110.61,2519.39 2120,2510 2120,2185.86 2125.86,2180 v1(2600,2180) ; v1(2900,2550) 2900,2499.18 2850,2449.18 v1(2850,2180) v1(2850,1700) 2984.14,1700 2990,1694.14 2990,710 3010,690 3294.14,690 3300,684.14 v1(3300,600) J2.8@3300,300
D4: B1.13 B2.13 J2.10 R110.2 R117.2 R133.2 U3.11 | length 10347.1
  Top Layer w10: R117.2@2386.5,1760 v1(2900,1760) ; R133.2@2386.5,2240 v1(2650,2240) v1(2900,2240) v1(3310,2240) 3449.14,2240 3455,2234.14 3455,1620 3470.86,1604.14 3563.79,1604.14 B1.13@3565.67,1606.02 ; U3.11@2539.76,2584.84 2556.14,2584.84 2560,2580.98 v1(2560,2500) ; v1(3390,600) 3839.14,600 3845,605.86 3845,1254.14 3829.14,1270 3465.86,1270 3460,1264.14 3460,991.88 3465.86,986.02 B2.13@3565.67,986.02 ; v1(4230,1020) 4230,950.86 4235.86,945 4798.93,945 4900,1046.07 4900,1188.5 R110.2@4910,1198.5
  Bottom Layer w10: v1(2560,2500) 2640,2500 2650,2490 v1(2650,2240) ; v1(2900,2240) v1(2900,1760) 2999.14,1760 3005,1754.14 3005,722.57 3022.57,705 3379.14,705 3390,694.14 v1(3390,600) 3395,595 3395,305 J2.10@3400,300 ; v1(3310,2240) 3521.51,2240 3943.79,1817.72 3943.79,825 4003.79,765 4185,765 4240,820 4240,899.59 4230,909.59 v1(4230,1020)
D5: B1.14 B2.14 J2.12 R109.2 R119.2 R135.2 U3.13 | length 10342.3
  Top Layer w10: R119.2@2386.5,1820 v1(2950,1820) ; R135.2@2386.5,2300 v1(2570,2300) v1(2950,2300) 3410.36,2300 3430.18,2280.18 v1(3430.18,2275) ; U3.13@2539.76,2636.02 2626.02,2636.02 2640,2622.05 v1(2640,2580) ; v1@3432.78,2277.57 3464.14,2277.57 3470,2271.72 3470,1650 3488.39,1631.61 B1.14@3565.67,1631.61 ; v1(3500,650) 3824.14,650 3830,655.86 3830,1239.14 3814.14,1255 3480.86,1255 3475,1249.14 3475,1017.47 3480.86,1011.61 B2.14@3565.67,1011.61 ; v1(4160,970) 4200,930 4805.15,930 4970,1094.85 R109.2@4970,1198.5
  Bottom Layer w10: v1(2570,2300) 2455.86,2300 2450,2305.86 2450,2574.14 2455.86,2580 v1(2640,2580) ; v1(2950,2300) v1(2950,1820) 3010,1820 3020,1810 3020,728.79 3028.79,720 3478.83,720 3500,698.83 v1(3500,650) ; v1(3430.18,2275) 3435.36,2280.18 3502.54,2280.18 3958.79,1823.93 3958.79,831.21 4010,780 4124.14,780 4160,815.86 v1(4160,970) ; v1@3494.14,640 3500,634.14 J2.12@3500,300
D6: B1.17 B2.17 J2.14 R108.2 R121.2 R137.2 U3.15 | length 10023.1
  Top Layer w10: R121.2@2386.5,1880 v1(3000,1880) ; R137.2@2386.5,2360 3480,2360 3490,2350 3490,1714.24 3495.86,1708.39 B1.17@3565.67,1708.39 ; U3.15@2539.76,2687.2 2617.2,2687.2 2640,2710 v1(3000,2710) ; B2.17@3565.67,1088.39 3495.86,1088.39 3490,1094.24 3490,1230.36 3499.64,1240 3805.36,1240 3815,1230.36 3815,705.86 3809.14,700 v1(3600,700) ; v1(4030,970) 4030,920.86 4035.86,915 4811.36,915 5030,1133.64 R108.2@5030,1198.5